# EAGLE board arduino_block-GiantPanel-v10 (EAGLE 6.6.0), part 1 of 16
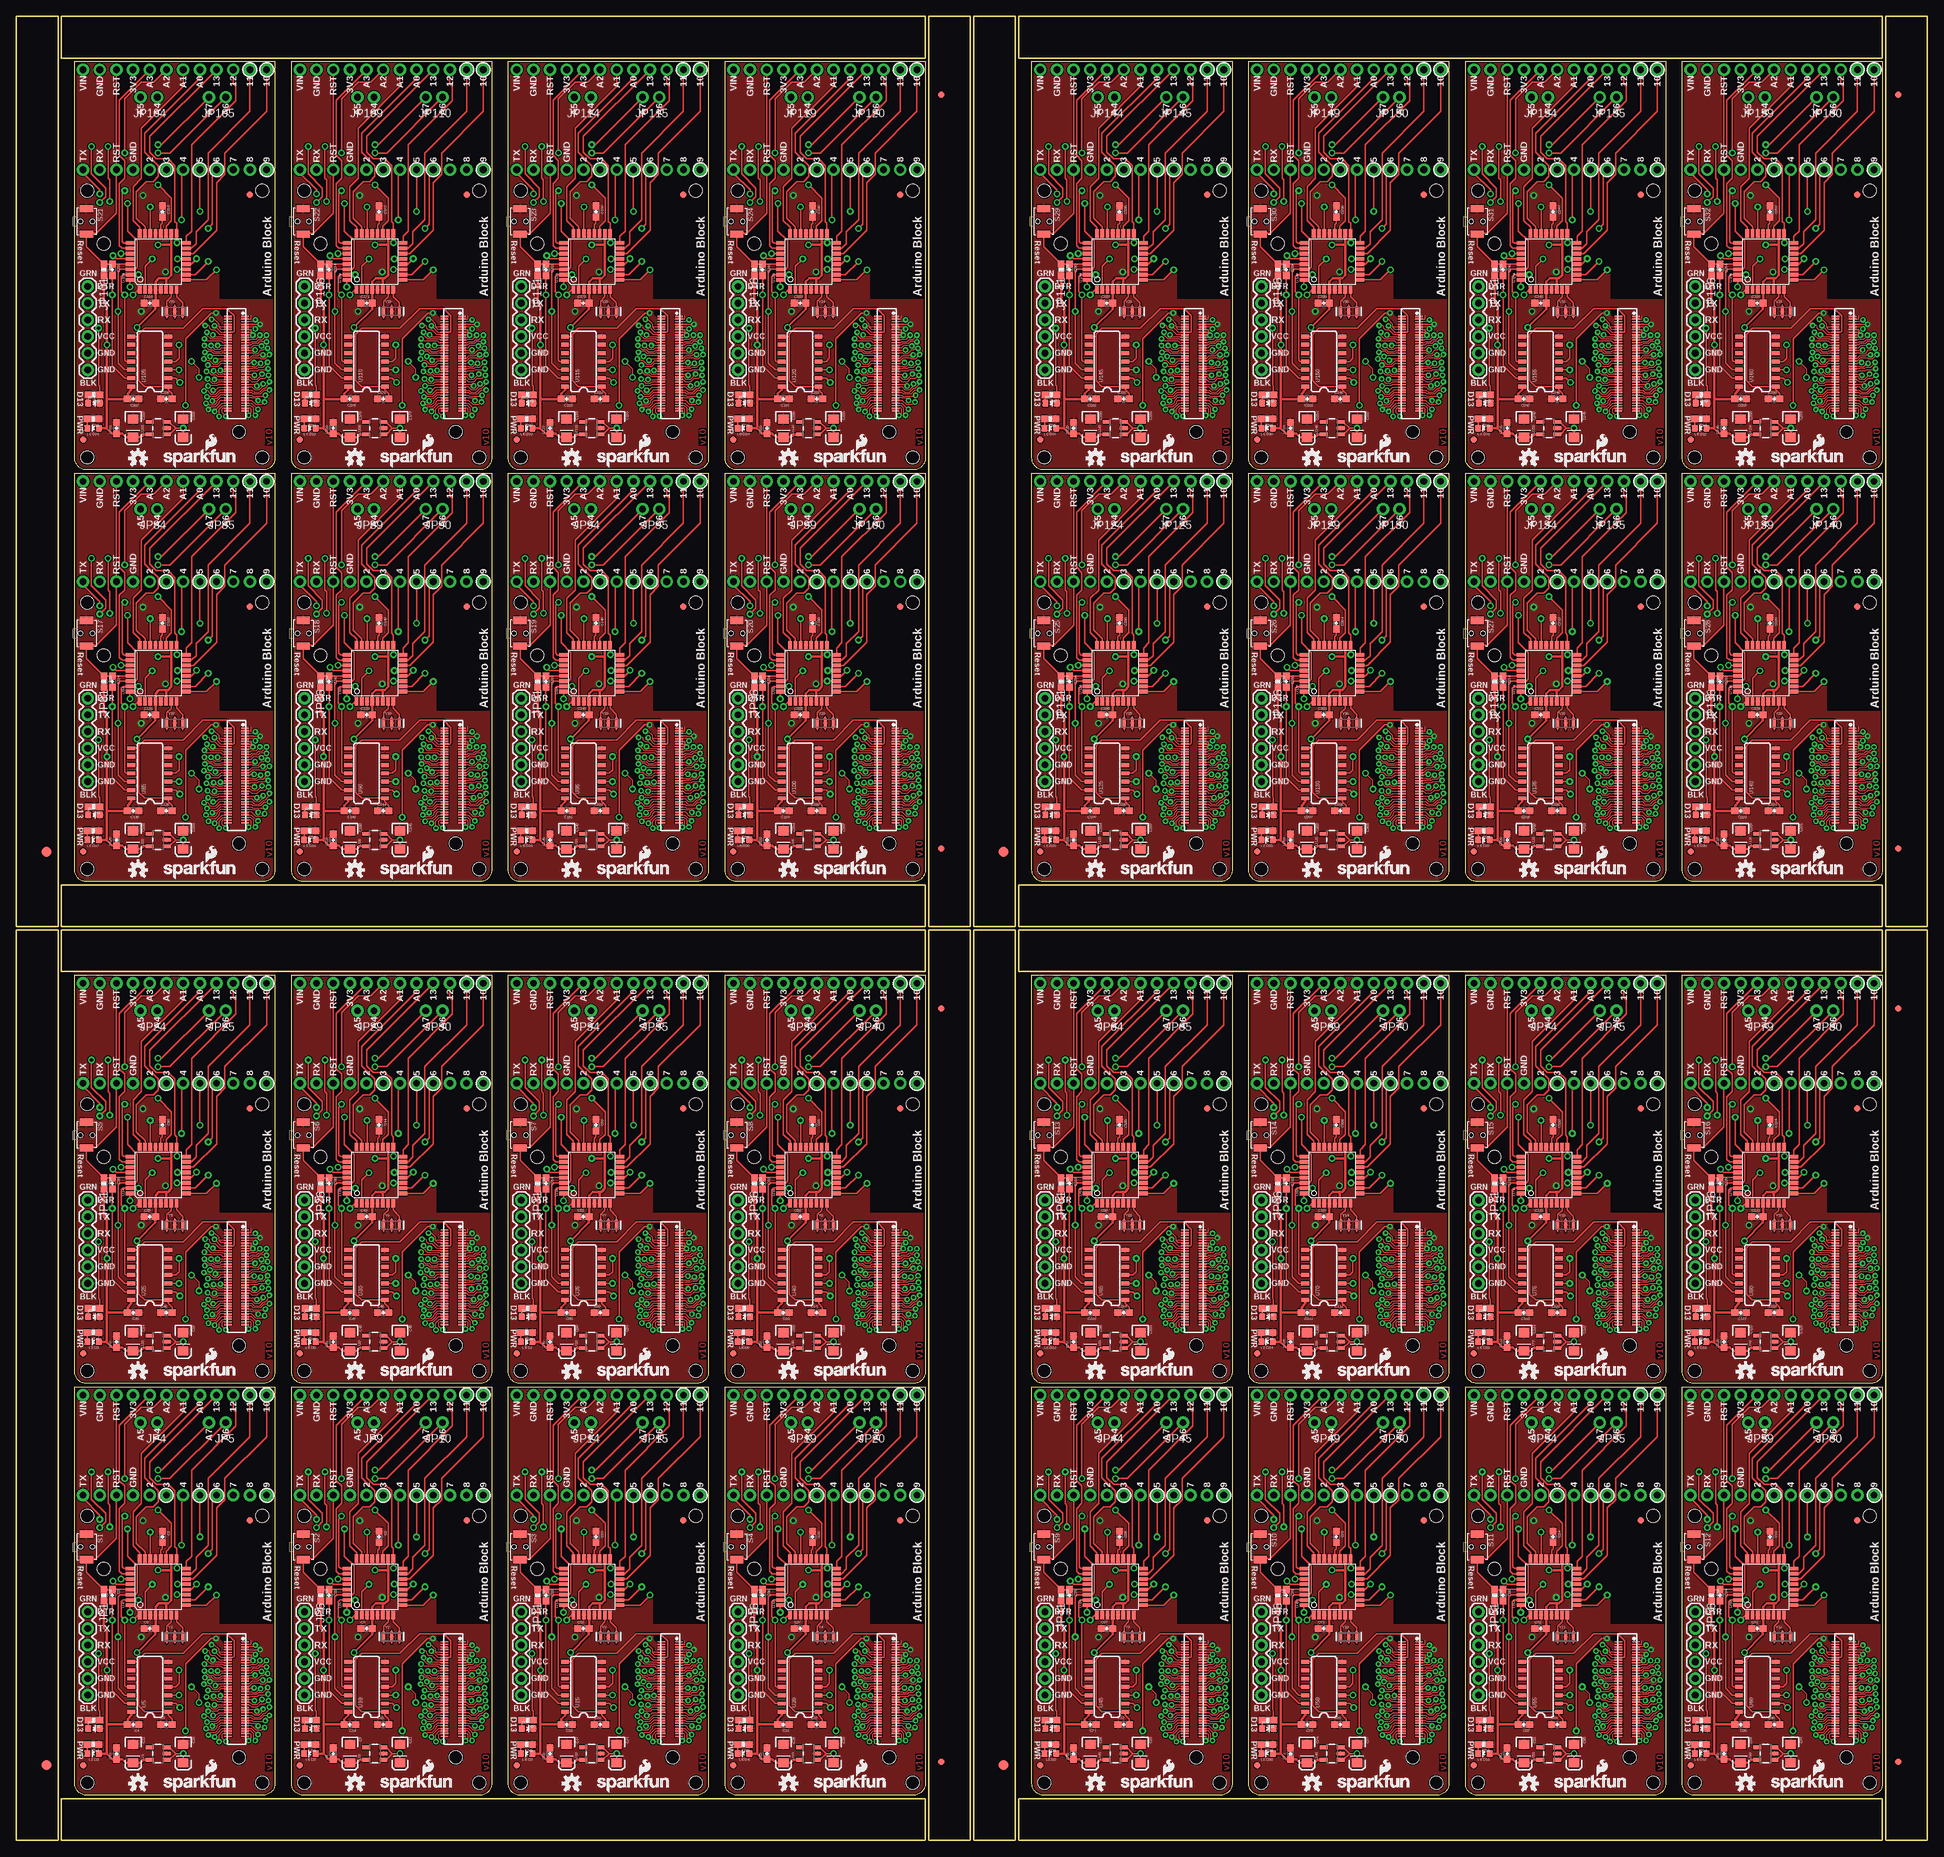
[diagram p0: board, top side]
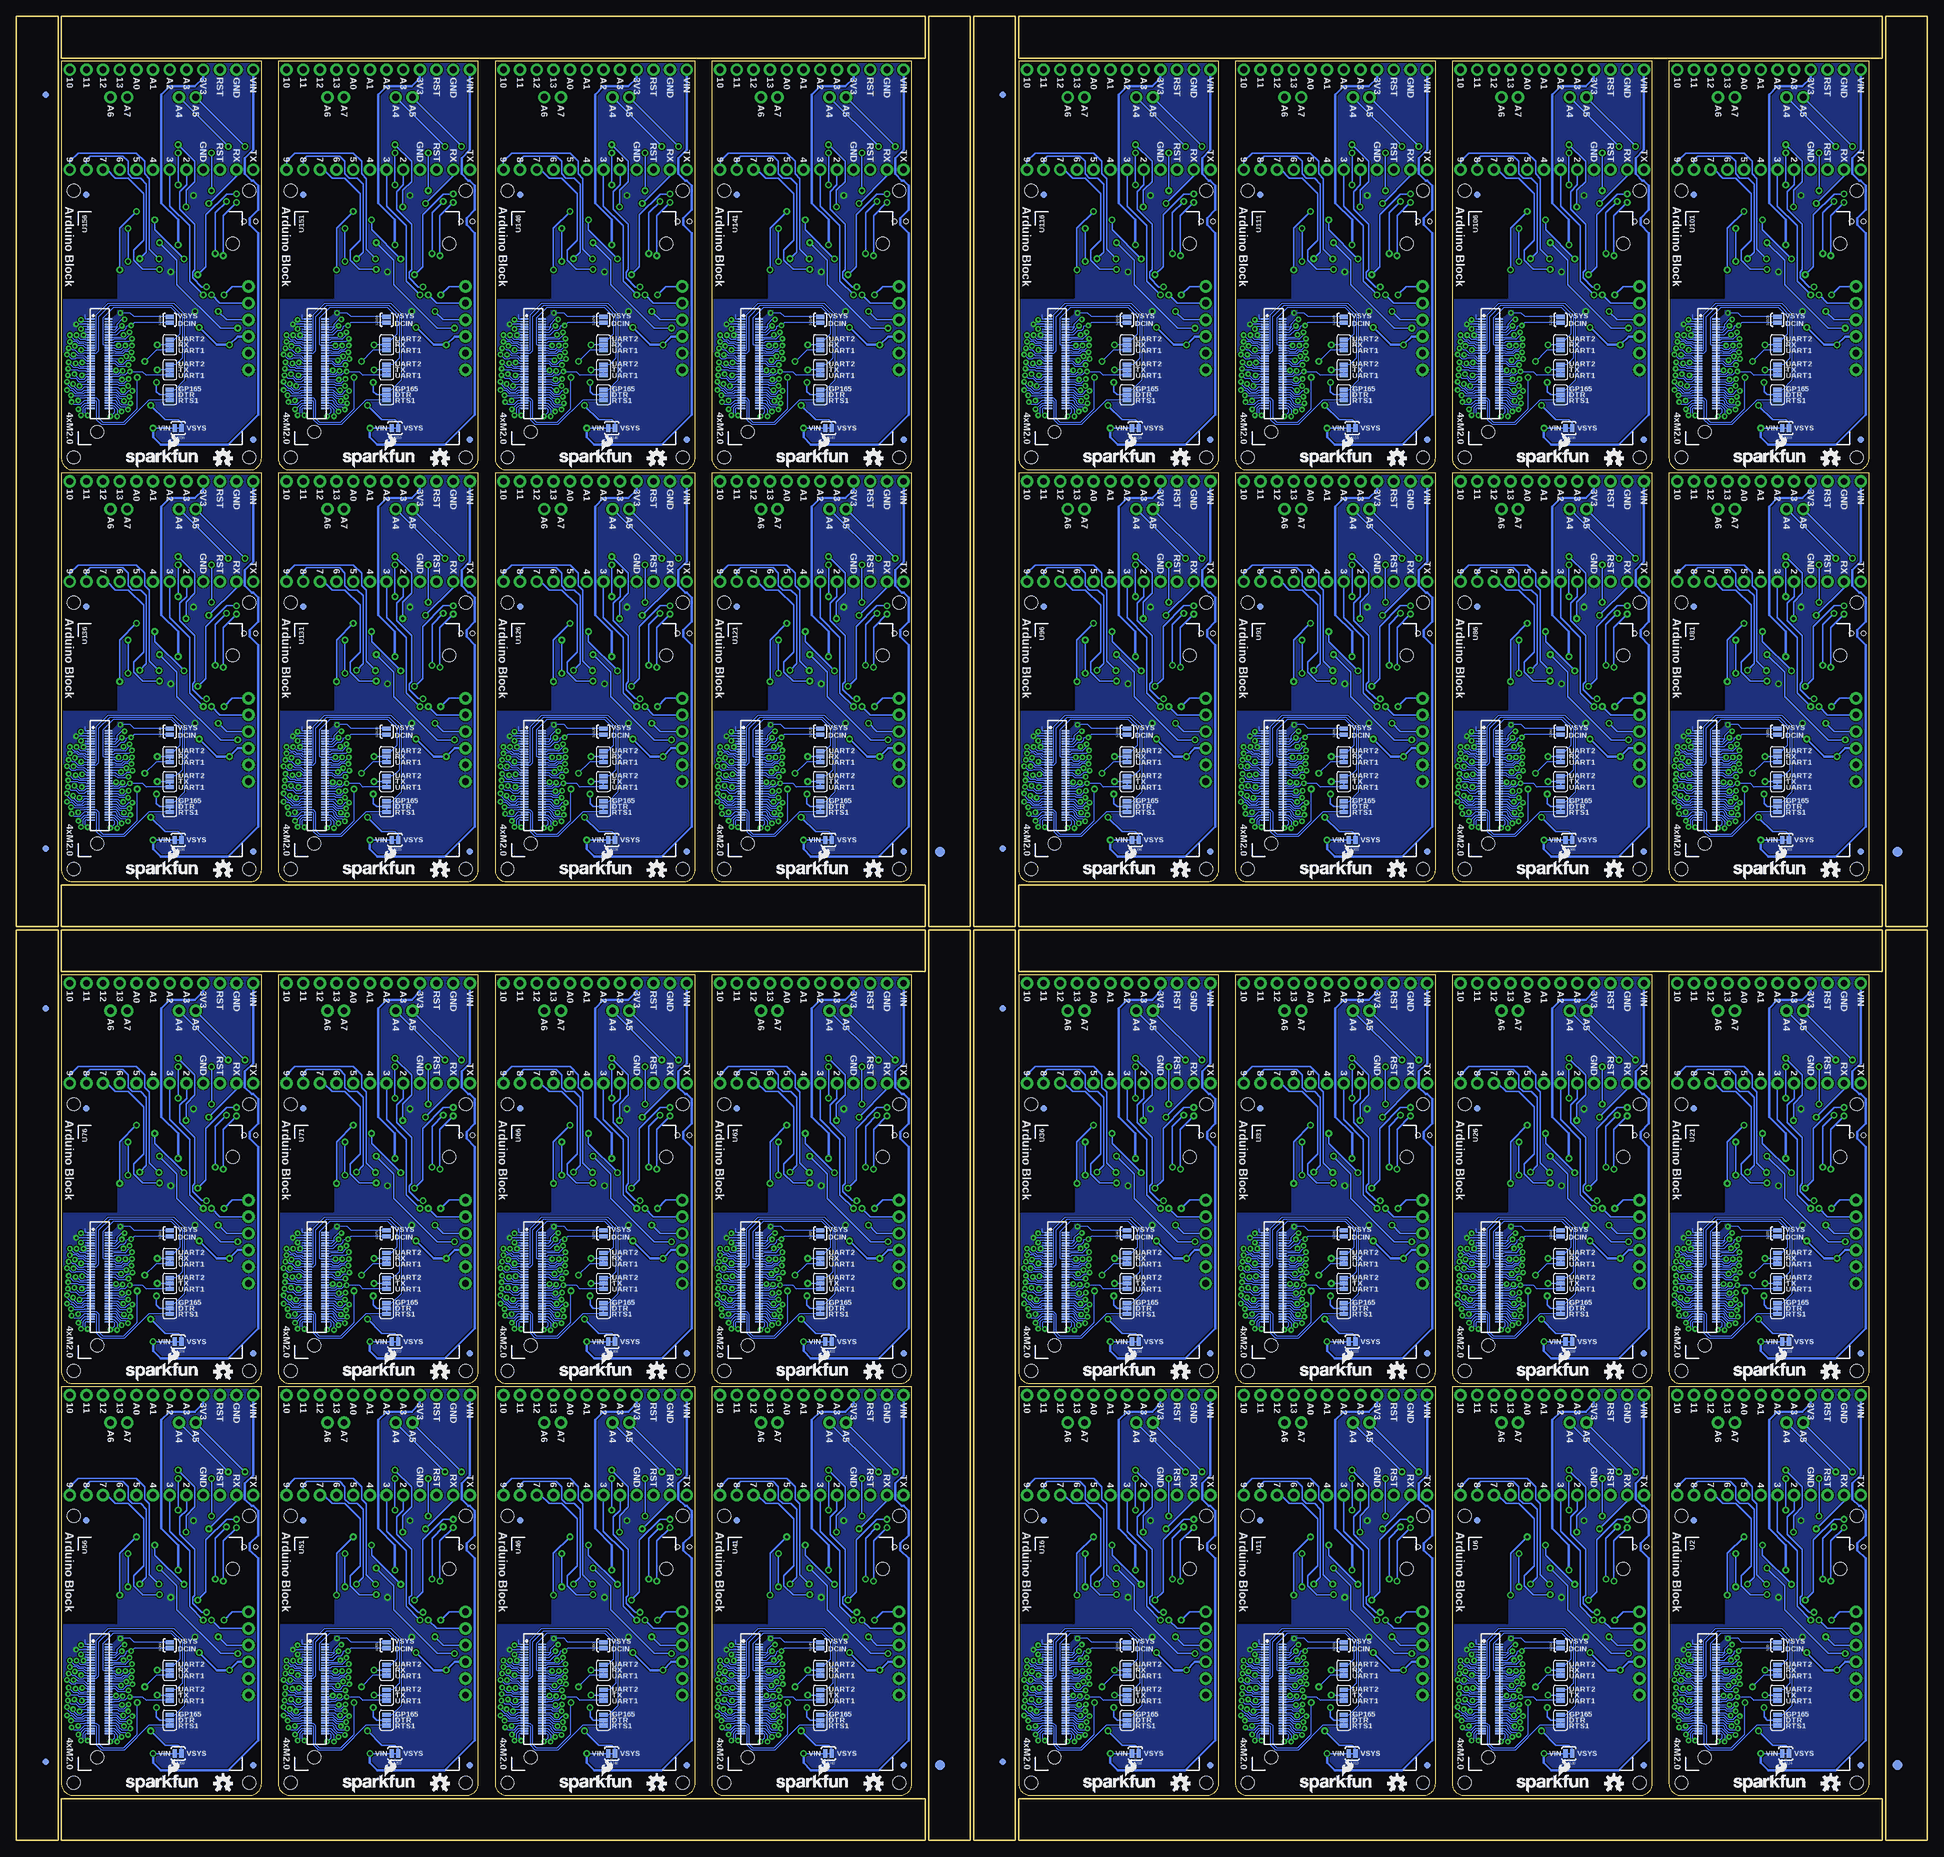
[diagram p1: board, bottom side, seen from below]

Size 291.08 x 277.88 mm. Coordinates in mm from the lower left corner, seen from the top.
Outline: 256 segments
Copper layers (1*16): Top 0.035mm / dielectric 1.5mm / Bottom 0.035mm
Design rules "SparkFun-2-layer *": minimum track width 6mil, minimum drill 13mil, track to track 6mil, track to pad 6mil, pad to pad 6mil, via to via 6mil, smd to smd 6mil, copper to edge 8mil, drill to drill 8mil, minimum pad ring 12mil, minimum via ring 10mil, stop-mask expansion 4mil, vias tented up to drill 20mil, thermal gap 6mil
Net classes: 1 vcc: width 0.254 mm
Holes 2 mm at 37.47,8.76 10.79,8.76 10.79,49.4 37.47,49.4 70.48,8.76 43.81,8.76 43.81,49.4 70.48,49.4 103.5,8.76 76.83,8.76 76.83,49.4 103.5,49.4 136.53,8.76 109.86,8.76 109.86,49.4 136.53,49.4 37.47,71.5 10.79,71.5 10.79,112.14 37.47,112.14 70.48,71.5 43.81,71.5 43.81,112.14 70.48,112.14 103.5,71.5 76.83,71.5 76.83,112.14 103.5,112.14 136.53,71.5 109.86,71.5 109.86,112.14 136.53,112.14 183.26,8.76 156.59,8.76 156.59,49.4 183.26,49.4 216.28,8.76 189.61,8.76 189.61,49.4 216.28,49.4 249.3,8.76 222.63,8.76 222.63,49.4 249.3,49.4 282.32,8.76 255.65,8.76 255.65,49.4 282.32,49.4 183.26,71.5 156.59,71.5 156.59,112.14 183.26,112.14 216.28,71.5 189.61,71.5 189.61,112.14 216.28,112.14 249.3,71.5 222.63,71.5 222.63,112.14 249.3,112.14 282.32,71.5 255.65,71.5 255.65,112.14 282.32,112.14 37.47,147.96 10.79,147.96 10.79,188.59 37.47,188.59 70.48,147.96 43.81,147.96 43.81,188.59 70.48,188.59 103.5,147.96 76.83,147.96 76.83,188.59 103.5,188.59 136.53,147.96 109.86,147.96 109.86,188.59 136.53,188.59 37.47,210.69 10.79,210.69 10.79,251.33 37.47,251.33 70.48,210.69 43.81,210.69 43.81,251.33 70.48,251.33 103.5,210.69 76.83,210.69 76.83,251.33 103.5,251.33 136.53,210.69 109.86,210.69 109.86,251.33 136.53,251.33 183.26,147.96 156.59,147.96 156.59,188.59 183.26,188.59 216.28,147.96 189.61,147.96 189.61,188.59 216.28,188.59 249.3,147.96 222.63,147.96 222.63,188.59 249.3,188.59 282.32,147.96 255.65,147.96 255.65,188.59 282.32,188.59 183.26,210.69 156.59,210.69 156.59,251.33 183.26,251.33 216.28,210.69 189.61,210.69 189.61,251.33 216.28,251.33 249.3,210.69 222.63,210.69 222.63,251.33 249.3,251.33 282.32,210.69 255.65,210.69 255.65,251.33 282.32,251.33
tRestrict: area 31,33 to 39.4,51.3; area 64,33 to 72.4,51.3; area 97,33 to 105.4,51.3; area 130,33 to 138.4,51.3; area 31,95.8 to 39.4,114; area 64,95.8 to 72.4,114; area 97,95.8 to 105.4,114; area 130,95.8 to 138.4,114; area 176.8,33 to 185.2,51.3; area 209.8,33 to 218.2,51.3; area 242.8,33 to 251.2,51.3; area 275.8,33 to 284.2,51.3; 20 more areas
bRestrict: area 31,33 to 39.4,51.3; area 64,33 to 72.4,51.3; area 97,33 to 105.4,51.3; area 130,33 to 138.4,51.3; area 31,95.8 to 39.4,114; area 64,95.8 to 72.4,114; area 97,95.8 to 105.4,114; area 130,95.8 to 138.4,114; area 176.8,33 to 185.2,51.3; area 209.8,33 to 218.2,51.3; area 242.8,33 to 251.2,51.3; area 275.8,33 to 284.2,51.3; 20 more areas

## Footprints (pad centres in the part's own frame; a part is rotated, then mirrored left to right if it is on the bottom)
0603-CAP = smd 1.1 x 1: 1 -0.85,0; 2 0.85,0
EIA3216 = smd 1.4 x 1.6: A 1.4,0; C -1.4,0
0603-LED-ALT1 = smd 1 x 1: A 0,-0.877; C 0,0.877
FIDUCIAL-1.5X3 = smd 1.5 x 1.5: 1 0,0
FIDUCIAL-1X2 = smd 1 x 1: 1 0,0
1X06 = drill 1.016 pad 1.88: 1 0,0; 2 2.54,0; 3 5.08,0; 4 7.62,0; 5 10.16,0; 6 12.7,0
1X12_NO_SILK = drill 1.016 pad 1.88: 1 0,0; 2 2.54,0; 3 5.08,0; 4 7.62,0; 5 10.16,0; 6 12.7,0; 7 15.24,0; 8 17.78,0; 9 20.32,0; 10 22.86,0; 11 25.4,0; 12 27.94,0
1X02_NO_SILK = drill 1.016 pad 1.88: 1 0,0; 2 2.54,0
0603-RES = smd 1.1 x 1: 1 -0.85,0; 2 0.85,0
TACTILE_SWITCH-SMD-RIGHT-ANGLE = smd 1.1 x 2: 1 -1.95,0; 2 1.95,0 | hole 0.7: 0,0.9; 0,-0.9
PAD-JUMPER-3-2OF3_NC_BY_TRACE_YES_SILK_FULL_BOX = smd 0.635 x 1.27: 1 -0.813,0; 2 0,0; 3 0.813,0
PAD-JUMPER-2-NC_BY_TRACE_YES_SILK = smd 0.635 x 1.27: 1 -0.508,0; 2 0.508,0
PAD-JUMPER-2-NO_YES_SILK = smd 0.635 x 1.27: 1 -0.45,0; 2 0.45,0
SOT23-5 = smd 0.55 x 1.2: 1 -0.95,-1.3; 2 0,-1.3; 3 0.95,-1.3; 4 0.95,1.3; 5 -0.95,1.3
EDISON_DAUGHTER = smd 1.14 x 0.2: 1 1.98,19.17; 2 4.62,19.17; 3 1.98,18.77; 4 4.62,18.77; 5 1.98,18.37; 6 4.62,18.37; 7 1.98,17.97; 8 4.62,17.97; 9 1.98,17.57; 10 4.62,17.57; 11 1.98,17.17; 12 4.62,17.17; 13 1.98,16.77; 14 4.62,16.77; 15 1.98,16.37; 16 4.62,16.37; 17 1.98,15.97; 18 4.62,15.97; 19 1.98,15.57; 20 4.62,15.57; 21 1.98,15.17; 22 4.62,15.17; 23 1.98,14.77; 24 4.62,14.77; 25 1.98,14.37; 26 4.62,14.37; 27 1.98,13.97; 28 4.62,13.97; 29 1.98,13.57; 30 4.62,13.57; 31 1.98,13.17; 32 4.62,13.17; 33 1.98,12.77; 34 4.62,12.77; 35 1.98,12.37; 36 4.62,12.37; 37 1.98,11.97; 38 4.62,11.97; 39 1.98,11.57; 40 4.62,11.57; 41 1.98,11.17; 42 4.62,11.17; 43 1.98,10.77; 44 4.62,10.77; 45 1.98,10.37; 46 4.62,10.37; 47 1.98,9.97; 48 4.62,9.97; 49 1.98,9.57; 50 4.62,9.57; 51 1.98,9.17; 52 4.62,9.17; 53 1.98,8.77; 54 4.62,8.77; 55 1.98,8.37; 56 4.62,8.37; 57 1.98,7.97; 58 4.62,7.97; 59 1.98,7.57; 60 4.62,7.57; 61 1.98,7.17; 62 4.62,7.17; 63 1.98,6.77; 64 4.62,6.77; 65 1.98,6.37; 66 4.62,6.37; 67 1.98,5.97; 68 4.62,5.97; 69 1.98,5.57; 70 4.62,5.57 | hole 2: 23.53,30.67; 2.93,1.98
DF40C-70DP-0.4(51) = smd 0.2 x 1.14 bottom: 1 6.8,1.32; 2 6.8,-1.32; 3 6.4,1.32; 4 6.4,-1.32; 5 6,1.32; 6 6,-1.32; 7 5.6,1.32; 8 5.6,-1.32; 9 5.2,1.32; 10 5.2,-1.32; 11 4.8,1.32; 12 4.8,-1.32; 13 4.4,1.32; 14 4.4,-1.32; 15 4,1.32; 16 4,-1.32; 17 3.6,1.32; 18 3.6,-1.32; 19 3.2,1.32; 20 3.2,-1.32; 21 2.8,1.32; 22 2.8,-1.32; 23 2.4,1.32; 24 2.4,-1.32; 25 2,1.32; 26 2,-1.32; 27 1.6,1.32; 28 1.6,-1.32; 29 1.2,1.32; 30 1.2,-1.32; 31 0.8,1.32; 32 0.8,-1.32; 33 0.4,1.32; 34 0.4,-1.32; 35 0,1.32; 36 0,-1.32; 37 -0.4,1.32; 38 -0.4,-1.32; 39 -0.8,1.32; 40 -0.8,-1.32; 41 -1.2,1.32; 42 -1.2,-1.32; 43 -1.6,1.32; 44 -1.6,-1.32; 45 -2,1.32; 46 -2,-1.32; 47 -2.4,1.32; 48 -2.4,-1.32; 49 -2.8,1.32; 50 -2.8,-1.32; 51 -3.2,1.32; 52 -3.2,-1.32; 53 -3.6,1.32; 54 -3.6,-1.32; 55 -4,1.32; 56 -4,-1.32; 57 -4.4,1.32; 58 -4.4,-1.32; 59 -4.8,1.32; 60 -4.8,-1.32; 61 -5.2,1.32; 62 -5.2,-1.32; 63 -5.6,1.32; 64 -5.6,-1.32; 65 -6,1.32; 66 -6,-1.32; 67 -6.4,1.32; 68 -6.4,-1.32; 69 -6.8,1.32; 70 -6.8,-1.32; NC1 7.2,1.32; NC2 7.2,-1.32; NC3 -7.2,-1.32; NC4 -7.2,1.32
TQFP32-08 = smd 1.27 x 0.559: 1 -4.293,2.8; 2 -4.293,2; 3 -4.293,1.2; 4 -4.293,0.4; 5 -4.293,-0.4; 6 -4.293,-1.2; 7 -4.293,-2; 8 -4.293,-2.8; 17 4.293,-2.8; 18 4.293,-2; 19 4.293,-1.2; 20 4.293,-0.4; 21 4.293,0.4; 22 4.293,1.2; 23 4.293,2; 24 4.293,2.8 | smd 0.559 x 1.27: 9 -2.8,-4.293; 10 -2,-4.293; 11 -1.2,-4.293; 12 -0.4,-4.293; 13 0.4,-4.293; 14 1.2,-4.293; 15 2,-4.293; 16 2.8,-4.293; 25 2.8,4.293; 26 2,4.293; 27 1.2,4.293; 28 0.4,4.293; 29 -0.4,4.293; 30 -1.2,4.293; 31 -2,4.293; 32 -2.8,4.293
SO14 = smd 0.6 x 1.2: 1 -3.81,-2.8; 2 -2.54,-2.8; 3 -1.27,-2.8; 4 0,-2.8; 5 1.27,-2.8; 6 2.54,-2.8; 7 3.81,-2.8; 8 3.81,2.8; 9 2.54,2.8; 10 1.27,2.8; 11 0,2.8; 12 -1.27,2.8; 13 -2.54,2.8; 14 -3.81,2.8
RESONATOR-SMD = smd 0.45 x 1.905: 1 -1.2,0; 2 0,0; 3 1.2,0

## Placement (x,y rotation side)
C1  0.1uF  [0603-CAP]  22.23,46.23 270 top
C2  0.1uF  [0603-CAP]  14.61,37.34 270 top
C3  0.1uF  [0603-CAP]  20.32,32.26 0 top
C4  0.1uF  [0603-CAP]  17.78,17.65 180 top
C5  0.1uF  [0603-CAP]  22.86,17.65 0 top
C6  0.1uF  [0603-CAP]  48.26,13.21 90 top
C7  10uF  [EIA3216]  50.8,13.21 270 top
C8  0.1uF  [0603-CAP]  53.34,32.26 0 top
C9  0.1uF  [0603-CAP]  55.24,46.23 270 top
C10  0.1uF  [0603-CAP]  15.24,13.21 90 top
C11  10uF  [EIA3216]  58.42,13.21 270 top
C12  0.1uF  [0603-CAP]  47.62,37.34 270 top
C13  10uF  [EIA3216]  17.78,13.21 270 top
C14  0.1uF  [0603-CAP]  50.8,17.65 180 top
C15  0.1uF  [0603-CAP]  55.88,17.65 0 top
C16  0.1uF  [0603-CAP]  81.28,13.21 90 top
C17  10uF  [EIA3216]  83.82,13.21 270 top
C18  0.1uF  [0603-CAP]  86.36,32.26 0 top
C19  10uF  [EIA3216]  25.4,13.21 270 top
C20  0.1uF  [0603-CAP]  88.27,46.23 270 top
C21  10uF  [EIA3216]  91.44,13.21 270 top
C22  0.1uF  [0603-CAP]  80.64,37.34 270 top
C23  0.1uF  [0603-CAP]  83.82,17.65 180 top
C24  0.1uF  [0603-CAP]  88.9,17.65 0 top
C25  0.1uF  [0603-CAP]  114.3,13.21 90 top
C26  10uF  [EIA3216]  116.84,13.21 270 top
C27  0.1uF  [0603-CAP]  119.38,32.26 0 top
C28  0.1uF  [0603-CAP]  121.28,46.23 270 top
C29  10uF  [EIA3216]  124.46,13.21 270 top
C30  0.1uF  [0603-CAP]  113.67,37.34 270 top
C31  0.1uF  [0603-CAP]  116.84,17.65 180 top
C32  0.1uF  [0603-CAP]  121.92,17.65 0 top
C33  0.1uF  [0603-CAP]  15.24,75.95 90 top
C34  10uF  [EIA3216]  17.78,75.95 270 top
C35  0.1uF  [0603-CAP]  20.32,95 0 top
C36  0.1uF  [0603-CAP]  22.23,108.97 270 top
C37  10uF  [EIA3216]  25.4,75.95 270 top
C38  0.1uF  [0603-CAP]  14.61,100.08 270 top
C39  0.1uF  [0603-CAP]  17.78,80.39 180 top
C40  0.1uF  [0603-CAP]  22.86,80.39 0 top
C41  0.1uF  [0603-CAP]  48.26,75.95 90 top
C42  10uF  [EIA3216]  50.8,75.95 270 top
C43  0.1uF  [0603-CAP]  53.34,95 0 top
C44  0.1uF  [0603-CAP]  55.24,108.97 270 top
C45  10uF  [EIA3216]  58.42,75.95 270 top
C46  0.1uF  [0603-CAP]  47.62,100.08 270 top
C47  0.1uF  [0603-CAP]  50.8,80.39 180 top
C48  0.1uF  [0603-CAP]  55.88,80.39 0 top
C49  0.1uF  [0603-CAP]  81.28,75.95 90 top
C50  10uF  [EIA3216]  83.82,75.95 270 top
C51  0.1uF  [0603-CAP]  86.36,95 0 top
C52  0.1uF  [0603-CAP]  88.27,108.97 270 top
C53  10uF  [EIA3216]  91.44,75.95 270 top
C54  0.1uF  [0603-CAP]  80.64,100.08 270 top
C55  0.1uF  [0603-CAP]  83.82,80.39 180 top
C56  0.1uF  [0603-CAP]  88.9,80.39 0 top
C57  0.1uF  [0603-CAP]  114.3,75.95 90 top
C58  10uF  [EIA3216]  116.84,75.95 270 top
C59  0.1uF  [0603-CAP]  119.38,95 0 top
C60  0.1uF  [0603-CAP]  121.28,108.97 270 top
C61  10uF  [EIA3216]  124.46,75.95 270 top
C62  0.1uF  [0603-CAP]  113.67,100.08 270 top
C63  0.1uF  [0603-CAP]  116.84,80.39 180 top
C64  0.1uF  [0603-CAP]  121.92,80.39 0 top
C65  0.1uF  [0603-CAP]  161.04,13.21 90 top
C66  10uF  [EIA3216]  163.58,13.21 270 top
C67  0.1uF  [0603-CAP]  166.12,32.26 0 top
C68  0.1uF  [0603-CAP]  168.02,46.23 270 top
C69  10uF  [EIA3216]  171.2,13.21 270 top
C70  0.1uF  [0603-CAP]  160.4,37.34 270 top
C71  0.1uF  [0603-CAP]  163.58,17.65 180 top
C72  0.1uF  [0603-CAP]  168.66,17.65 0 top
C73  0.1uF  [0603-CAP]  194.06,13.21 90 top
C74  10uF  [EIA3216]  196.6,13.21 270 top
C75  0.1uF  [0603-CAP]  199.14,32.26 0 top
C76  0.1uF  [0603-CAP]  201.04,46.23 270 top
C77  10uF  [EIA3216]  204.22,13.21 270 top
C78  0.1uF  [0603-CAP]  193.42,37.34 270 top
C79  0.1uF  [0603-CAP]  196.6,17.65 180 top
C80  0.1uF  [0603-CAP]  201.68,17.65 0 top
C81  0.1uF  [0603-CAP]  227.08,13.21 90 top
C82  10uF  [EIA3216]  229.62,13.21 270 top
C83  0.1uF  [0603-CAP]  232.16,32.26 0 top
C84  0.1uF  [0603-CAP]  234.06,46.23 270 top
C85  10uF  [EIA3216]  237.24,13.21 270 top
C86  0.1uF  [0603-CAP]  226.44,37.34 270 top
C87  0.1uF  [0603-CAP]  229.62,17.65 180 top
C88  0.1uF  [0603-CAP]  234.7,17.65 0 top
C89  0.1uF  [0603-CAP]  260.1,13.21 90 top
C90  10uF  [EIA3216]  262.64,13.21 270 top
C91  0.1uF  [0603-CAP]  265.18,32.26 0 top
C92  0.1uF  [0603-CAP]  267.08,46.23 270 top
C93  10uF  [EIA3216]  270.26,13.21 270 top
C94  0.1uF  [0603-CAP]  259.46,37.34 270 top
C95  0.1uF  [0603-CAP]  262.64,17.65 180 top
C96  0.1uF  [0603-CAP]  267.72,17.65 0 top
C97  0.1uF  [0603-CAP]  161.04,75.95 90 top
C98  10uF  [EIA3216]  163.58,75.95 270 top
C99  0.1uF  [0603-CAP]  166.12,95 0 top
C100  0.1uF  [0603-CAP]  168.02,108.97 270 top
C101  10uF  [EIA3216]  171.2,75.95 270 top
C102  0.1uF  [0603-CAP]  160.4,100.08 270 top
C103  0.1uF  [0603-CAP]  163.58,80.39 180 top
C104  0.1uF  [0603-CAP]  168.66,80.39 0 top
C105  0.1uF  [0603-CAP]  194.06,75.95 90 top
C106  10uF  [EIA3216]  196.6,75.95 270 top
C107  0.1uF  [0603-CAP]  199.14,95 0 top
C108  0.1uF  [0603-CAP]  201.04,108.97 270 top
C109  10uF  [EIA3216]  204.22,75.95 270 top
C110  0.1uF  [0603-CAP]  193.42,100.08 270 top
C111  0.1uF  [0603-CAP]  196.6,80.39 180 top
C112  0.1uF  [0603-CAP]  201.68,80.39 0 top
C113  0.1uF  [0603-CAP]  227.08,75.95 90 top
C114  10uF  [EIA3216]  229.62,75.95 270 top
C115  0.1uF  [0603-CAP]  232.16,95 0 top
C116  0.1uF  [0603-CAP]  234.06,108.97 270 top
C117  10uF  [EIA3216]  237.24,75.95 270 top
C118  0.1uF  [0603-CAP]  226.44,100.08 270 top
C119  0.1uF  [0603-CAP]  229.62,80.39 180 top
C120  0.1uF  [0603-CAP]  234.7,80.39 0 top
C121  0.1uF  [0603-CAP]  260.1,75.95 90 top
C122  10uF  [EIA3216]  262.64,75.95 270 top
C123  0.1uF  [0603-CAP]  265.18,95 0 top
C124  0.1uF  [0603-CAP]  267.08,108.97 270 top
C125  10uF  [EIA3216]  270.26,75.95 270 top
C126  0.1uF  [0603-CAP]  259.46,100.08 270 top
C127  0.1uF  [0603-CAP]  262.64,80.39 180 top
C128  0.1uF  [0603-CAP]  267.72,80.39 0 top
C129  0.1uF  [0603-CAP]  15.24,152.4 90 top
C130  10uF  [EIA3216]  17.78,152.4 270 top
C131  0.1uF  [0603-CAP]  20.32,171.45 0 top
C132  0.1uF  [0603-CAP]  22.23,185.42 270 top
C133  10uF  [EIA3216]  25.4,152.4 270 top
C134  0.1uF  [0603-CAP]  14.61,176.53 270 top
C135  0.1uF  [0603-CAP]  17.78,156.84 180 top
C136  0.1uF  [0603-CAP]  22.86,156.84 0 top
C137  0.1uF  [0603-CAP]  48.26,152.4 90 top
C138  10uF  [EIA3216]  50.8,152.4 270 top
C139  0.1uF  [0603-CAP]  53.34,171.45 0 top
C140  0.1uF  [0603-CAP]  55.24,185.42 270 top
C141  10uF  [EIA3216]  58.42,152.4 270 top
C142  0.1uF  [0603-CAP]  47.62,176.53 270 top
C143  0.1uF  [0603-CAP]  50.8,156.84 180 top
C144  0.1uF  [0603-CAP]  55.88,156.84 0 top
C145  0.1uF  [0603-CAP]  81.28,152.4 90 top
C146  10uF  [EIA3216]  83.82,152.4 270 top
C147  0.1uF  [0603-CAP]  86.36,171.45 0 top
C148  0.1uF  [0603-CAP]  88.27,185.42 270 top
C149  10uF  [EIA3216]  91.44,152.4 270 top
C150  0.1uF  [0603-CAP]  80.64,176.53 270 top
C151  0.1uF  [0603-CAP]  83.82,156.84 180 top
C152  0.1uF  [0603-CAP]  88.9,156.84 0 top
C153  0.1uF  [0603-CAP]  114.3,152.4 90 top
C154  10uF  [EIA3216]  116.84,152.4 270 top
C155  0.1uF  [0603-CAP]  119.38,171.45 0 top
C156  0.1uF  [0603-CAP]  121.28,185.42 270 top
C157  10uF  [EIA3216]  124.46,152.4 270 top
C158  0.1uF  [0603-CAP]  113.67,176.53 270 top
C159  0.1uF  [0603-CAP]  116.84,156.84 180 top
C160  0.1uF  [0603-CAP]  121.92,156.84 0 top
C161  0.1uF  [0603-CAP]  15.24,215.14 90 top
C162  10uF  [EIA3216]  17.78,215.14 270 top
C163  0.1uF  [0603-CAP]  20.32,234.19 0 top
C164  0.1uF  [0603-CAP]  22.23,248.16 270 top
C165  10uF  [EIA3216]  25.4,215.14 270 top
C166  0.1uF  [0603-CAP]  14.61,239.27 270 top
C167  0.1uF  [0603-CAP]  17.78,219.58 180 top
C168  0.1uF  [0603-CAP]  22.86,219.58 0 top
C169  0.1uF  [0603-CAP]  48.26,215.14 90 top
C170  10uF  [EIA3216]  50.8,215.14 270 top
C171  0.1uF  [0603-CAP]  53.34,234.19 0 top
C172  0.1uF  [0603-CAP]  55.24,248.16 270 top
C173  10uF  [EIA3216]  58.42,215.14 270 top
C174  0.1uF  [0603-CAP]  47.62,239.27 270 top
C175  0.1uF  [0603-CAP]  50.8,219.58 180 top
C176  0.1uF  [0603-CAP]  55.88,219.58 0 top
C177  0.1uF  [0603-CAP]  81.28,215.14 90 top
C178  10uF  [EIA3216]  83.82,215.14 270 top
C179  0.1uF  [0603-CAP]  86.36,234.19 0 top
C180  0.1uF  [0603-CAP]  88.27,248.16 270 top
C181  10uF  [EIA3216]  91.44,215.14 270 top
C182  0.1uF  [0603-CAP]  80.64,239.27 270 top
C183  0.1uF  [0603-CAP]  83.82,219.58 180 top
C184  0.1uF  [0603-CAP]  88.9,219.58 0 top
C185  0.1uF  [0603-CAP]  114.3,215.14 90 top
C186  10uF  [EIA3216]  116.84,215.14 270 top
C187  0.1uF  [0603-CAP]  119.38,234.19 0 top
C188  0.1uF  [0603-CAP]  121.28,248.16 270 top
C189  10uF  [EIA3216]  124.46,215.14 270 top
C190  0.1uF  [0603-CAP]  113.67,239.27 270 top
C191  0.1uF  [0603-CAP]  116.84,219.58 180 top
C192  0.1uF  [0603-CAP]  121.92,219.58 0 top
C193  0.1uF  [0603-CAP]  161.04,152.4 90 top
C194  10uF  [EIA3216]  163.58,152.4 270 top
C195  0.1uF  [0603-CAP]  166.12,171.45 0 top
C196  0.1uF  [0603-CAP]  168.02,185.42 270 top
C197  10uF  [EIA3216]  171.2,152.4 270 top
C198  0.1uF  [0603-CAP]  160.4,176.53 270 top
C199  0.1uF  [0603-CAP]  163.58,156.84 180 top
C200  0.1uF  [0603-CAP]  168.66,156.84 0 top
C201  0.1uF  [0603-CAP]  194.06,152.4 90 top
C202  10uF  [EIA3216]  196.6,152.4 270 top
C203  0.1uF  [0603-CAP]  199.14,171.45 0 top
C204  0.1uF  [0603-CAP]  201.04,185.42 270 top
C205  10uF  [EIA3216]  204.22,152.4 270 top
C206  0.1uF  [0603-CAP]  193.42,176.53 270 top
C207  0.1uF  [0603-CAP]  196.6,156.84 180 top
C208  0.1uF  [0603-CAP]  201.68,156.84 0 top
C209  0.1uF  [0603-CAP]  227.08,152.4 90 top
C210  10uF  [EIA3216]  229.62,152.4 270 top
C211  0.1uF  [0603-CAP]  232.16,171.45 0 top
C212  0.1uF  [0603-CAP]  234.06,185.42 270 top
C213  10uF  [EIA3216]  237.24,152.4 270 top
C214  0.1uF  [0603-CAP]  226.44,176.53 270 top
C215  0.1uF  [0603-CAP]  229.62,156.84 180 top
C216  0.1uF  [0603-CAP]  234.7,156.84 0 top
C217  0.1uF  [0603-CAP]  260.1,152.4 90 top
C218  10uF  [EIA3216]  262.64,152.4 270 top
C219  0.1uF  [0603-CAP]  265.18,171.45 0 top
C220  0.1uF  [0603-CAP]  267.08,185.42 270 top
C221  10uF  [EIA3216]  270.26,152.4 270 top
C222  0.1uF  [0603-CAP]  259.46,176.53 270 top
C223  0.1uF  [0603-CAP]  262.64,156.84 180 top
C224  0.1uF  [0603-CAP]  267.72,156.84 0 top
C225  0.1uF  [0603-CAP]  161.04,215.14 90 top
C226  10uF  [EIA3216]  163.58,215.14 270 top
C227  0.1uF  [0603-CAP]  166.12,234.19 0 top
C228  0.1uF  [0603-CAP]  168.02,248.16 270 top
C229  10uF  [EIA3216]  171.2,215.14 270 top
C230  0.1uF  [0603-CAP]  160.4,239.27 270 top
C231  0.1uF  [0603-CAP]  163.58,219.58 180 top
C232  0.1uF  [0603-CAP]  168.66,219.58 0 top
C233  0.1uF  [0603-CAP]  194.06,215.14 90 top
C234  10uF  [EIA3216]  196.6,215.14 270 top
C235  0.1uF  [0603-CAP]  199.14,234.19 0 top
C236  0.1uF  [0603-CAP]  201.04,248.16 270 top
C237  10uF  [EIA3216]  204.22,215.14 270 top
C238  0.1uF  [0603-CAP]  193.42,239.27 270 top
C239  0.1uF  [0603-CAP]  196.6,219.58 180 top
C240  0.1uF  [0603-CAP]  201.68,219.58 0 top
C241  0.1uF  [0603-CAP]  227.08,215.14 90 top
C242  10uF  [EIA3216]  229.62,215.14 270 top
C243  0.1uF  [0603-CAP]  232.16,234.19 0 top
C244  0.1uF  [0603-CAP]  234.06,248.16 270 top
C245  10uF  [EIA3216]  237.24,215.14 270 top
C246  0.1uF  [0603-CAP]  226.44,239.27 270 top
C247  0.1uF  [0603-CAP]  229.62,219.58 180 top
C248  0.1uF  [0603-CAP]  234.7,219.58 0 top
C249  0.1uF  [0603-CAP]  260.1,215.14 90 top
C250  10uF  [EIA3216]  262.64,215.14 270 top
C251  0.1uF  [0603-CAP]  265.18,234.19 0 top
C252  0.1uF  [0603-CAP]  267.08,248.16 270 top
C253  10uF  [EIA3216]  270.26,215.14 270 top
C254  0.1uF  [0603-CAP]  259.46,239.27 270 top
C255  0.1uF  [0603-CAP]  262.64,219.58 180 top
C256  0.1uF  [0603-CAP]  267.72,219.58 0 top
D1  Green  [0603-LED-ALT1]  44.83,17.02 270 top
D2  Green  [0603-LED-ALT1]  77.85,17.02 270 top
D3  Green  [0603-LED-ALT1]  11.81,17.02 270 top
D4  Green  [0603-LED-ALT1]  110.87,17.02 270 top
D5  Green  [0603-LED-ALT1]  11.81,79.76 270 top
D6  Green  [0603-LED-ALT1]  44.83,79.76 270 top
D7  Green  [0603-LED-ALT1]  77.85,79.76 270 top
D8  Green  [0603-LED-ALT1]  110.87,79.76 270 top
D9  Green  [0603-LED-ALT1]  157.61,17.02 270 top
D10  Green  [0603-LED-ALT1]  190.63,17.02 270 top
D11  Green  [0603-LED-ALT1]  223.65,17.02 270 top
D12  Green  [0603-LED-ALT1]  256.67,17.02 270 top
D13  Green  [0603-LED-ALT1]  157.61,79.76 270 top
D14  Green  [0603-LED-ALT1]  190.63,79.76 270 top
D15  Green  [0603-LED-ALT1]  223.65,79.76 270 top
D16  Green  [0603-LED-ALT1]  256.67,79.76 270 top
D17  Green  [0603-LED-ALT1]  11.81,156.21 270 top
D18  Green  [0603-LED-ALT1]  44.83,156.21 270 top
D19  Green  [0603-LED-ALT1]  77.85,156.21 270 top
D20  Green  [0603-LED-ALT1]  110.87,156.21 270 top
D21  Green  [0603-LED-ALT1]  11.81,218.95 270 top
D22  Green  [0603-LED-ALT1]  44.83,218.95 270 top
D23  Green  [0603-LED-ALT1]  77.85,218.95 270 top
D24  Green  [0603-LED-ALT1]  110.87,218.95 270 top
D25  Green  [0603-LED-ALT1]  157.61,156.21 270 top
D26  Green  [0603-LED-ALT1]  190.63,156.21 270 top
D27  Green  [0603-LED-ALT1]  223.65,156.21 270 top
D28  Green  [0603-LED-ALT1]  256.67,156.21 270 top
D29  Green  [0603-LED-ALT1]  157.61,218.95 270 top
D30  Green  [0603-LED-ALT1]  190.63,218.95 270 top
D31  Green  [0603-LED-ALT1]  223.65,218.95 270 top
D32  Green  [0603-LED-ALT1]  256.67,218.95 270 top
E$1  [FIDUCIAL-1.5X3]  4.57,11.43 0 top
E$2  [FIDUCIAL-1.5X3]  4.57,11.43 0 bottom
E$3  [FIDUCIAL-1X2]  140.84,126.75 180 bottom
E$4  [FIDUCIAL-1X2]  140.84,11.94 0 top
E$5  [FIDUCIAL-1X2]  140.84,126.75 180 top
E$6  [FIDUCIAL-1X2]  140.84,11.94 0 bottom
E$7  [FIDUCIAL-1X2]  286.64,11.94 0 top
E$8  [FIDUCIAL-1X2]  286.64,126.75 180 top
E$9  [FIDUCIAL-1.5X3]  150.37,11.43 0 top
E$10  [FIDUCIAL-1.5X3]  150.37,11.43 0 bottom
E$11  [FIDUCIAL-1X2]  286.64,126.75 180 bottom
E$12  [FIDUCIAL-1X2]  286.64,11.94 0 bottom
E$13  [FIDUCIAL-1X2]  140.84,151.13 0 top
E$14  [FIDUCIAL-1X2]  140.84,265.94 180 top
E$15  [FIDUCIAL-1.5X3]  4.57,150.62 0 top
E$16  [FIDUCIAL-1.5X3]  4.57,150.62 0 bottom
E$17  [FIDUCIAL-1X2]  140.84,265.94 180 bottom
E$18  [FIDUCIAL-1X2]  140.84,151.13 0 bottom
E$19  [FIDUCIAL-1X2]  286.64,151.13 0 top
E$20  [FIDUCIAL-1X2]  286.64,265.94 180 top
E$21  [FIDUCIAL-1.5X3]  150.37,150.62 0 top
E$22  [FIDUCIAL-1.5X3]  150.37,150.62 0 bottom
E$23  [FIDUCIAL-1X2]  286.64,265.94 180 bottom
E$24  [FIDUCIAL-1X2]  286.64,151.13 0 bottom
FID1  FIDUCIAL1X2  [FIDUCIAL-1X2]  10.16,11.43 0 top
FID2  FIDUCIAL1X2  [FIDUCIAL-1X2]  35.56,48.77 0 top
FID3  FIDUCIAL1X2  [FIDUCIAL-1X2]  10.16,11.43 0 bottom
FID4  FIDUCIAL1X2  [FIDUCIAL-1X2]  35.56,48.77 0 bottom
FID5  FIDUCIAL1X2  [FIDUCIAL-1X2]  43.18,11.43 0 top
FID6  FIDUCIAL1X2  [FIDUCIAL-1X2]  68.58,48.77 0 top
FID7  FIDUCIAL1X2  [FIDUCIAL-1X2]  43.18,11.43 0 bottom
FID8  FIDUCIAL1X2  [FIDUCIAL-1X2]  68.58,48.77 0 bottom
FID9  FIDUCIAL1X2  [FIDUCIAL-1X2]  76.2,11.43 0 top
FID10  FIDUCIAL1X2  [FIDUCIAL-1X2]  101.6,48.77 0 top
FID11  FIDUCIAL1X2  [FIDUCIAL-1X2]  76.2,11.43 0 bottom
FID12  FIDUCIAL1X2  [FIDUCIAL-1X2]  101.6,48.77 0 bottom
FID13  FIDUCIAL1X2  [FIDUCIAL-1X2]  109.22,11.43 0 top
FID14  FIDUCIAL1X2  [FIDUCIAL-1X2]  134.62,48.77 0 top
FID15  FIDUCIAL1X2  [FIDUCIAL-1X2]  109.22,11.43 0 bottom
FID16  FIDUCIAL1X2  [FIDUCIAL-1X2]  134.62,48.77 0 bottom
FID17  FIDUCIAL1X2  [FIDUCIAL-1X2]  10.16,74.17 0 top
FID18  FIDUCIAL1X2  [FIDUCIAL-1X2]  35.56,111.51 0 top
FID19  FIDUCIAL1X2  [FIDUCIAL-1X2]  10.16,74.17 0 bottom
FID20  FIDUCIAL1X2  [FIDUCIAL-1X2]  35.56,111.51 0 bottom
FID21  FIDUCIAL1X2  [FIDUCIAL-1X2]  43.18,74.17 0 top
FID22  FIDUCIAL1X2  [FIDUCIAL-1X2]  68.58,111.51 0 top
FID23  FIDUCIAL1X2  [FIDUCIAL-1X2]  43.18,74.17 0 bottom
FID24  FIDUCIAL1X2  [FIDUCIAL-1X2]  68.58,111.51 0 bottom
FID25  FIDUCIAL1X2  [FIDUCIAL-1X2]  76.2,74.17 0 top
FID26  FIDUCIAL1X2  [FIDUCIAL-1X2]  101.6,111.51 0 top
FID27  FIDUCIAL1X2  [FIDUCIAL-1X2]  76.2,74.17 0 bottom
FID28  FIDUCIAL1X2  [FIDUCIAL-1X2]  101.6,111.51 0 bottom
FID29  FIDUCIAL1X2  [FIDUCIAL-1X2]  109.22,74.17 0 top
FID30  FIDUCIAL1X2  [FIDUCIAL-1X2]  134.62,111.51 0 top
FID31  FIDUCIAL1X2  [FIDUCIAL-1X2]  109.22,74.17 0 bottom
FID32  FIDUCIAL1X2  [FIDUCIAL-1X2]  134.62,111.51 0 bottom
FID33  FIDUCIAL1X2  [FIDUCIAL-1X2]  155.96,11.43 0 top
FID34  FIDUCIAL1X2  [FIDUCIAL-1X2]  181.36,48.77 0 top
FID35  FIDUCIAL1X2  [FIDUCIAL-1X2]  155.96,11.43 0 bottom
FID36  FIDUCIAL1X2  [FIDUCIAL-1X2]  181.36,48.77 0 bottom
FID37  FIDUCIAL1X2  [FIDUCIAL-1X2]  188.98,11.43 0 top
FID38  FIDUCIAL1X2  [FIDUCIAL-1X2]  214.38,48.77 0 top
FID39  FIDUCIAL1X2  [FIDUCIAL-1X2]  188.98,11.43 0 bottom
FID40  FIDUCIAL1X2  [FIDUCIAL-1X2]  214.38,48.77 0 bottom
FID41  FIDUCIAL1X2  [FIDUCIAL-1X2]  222,11.43 0 top
FID42  FIDUCIAL1X2  [FIDUCIAL-1X2]  247.4,48.77 0 top
FID43  FIDUCIAL1X2  [FIDUCIAL-1X2]  222,11.43 0 bottom
FID44  FIDUCIAL1X2  [FIDUCIAL-1X2]  247.4,48.77 0 bottom
FID45  FIDUCIAL1X2  [FIDUCIAL-1X2]  255.02,11.43 0 top
FID46  FIDUCIAL1X2  [FIDUCIAL-1X2]  280.42,48.77 0 top
FID47  FIDUCIAL1X2  [FIDUCIAL-1X2]  255.02,11.43 0 bottom
FID48  FIDUCIAL1X2  [FIDUCIAL-1X2]  280.42,48.77 0 bottom
FID49  FIDUCIAL1X2  [FIDUCIAL-1X2]  155.96,74.17 0 top
FID50  FIDUCIAL1X2  [FIDUCIAL-1X2]  181.36,111.51 0 top
FID51  FIDUCIAL1X2  [FIDUCIAL-1X2]  155.96,74.17 0 bottom
FID52  FIDUCIAL1X2  [FIDUCIAL-1X2]  181.36,111.51 0 bottom
FID53  FIDUCIAL1X2  [FIDUCIAL-1X2]  188.98,74.17 0 top
FID54  FIDUCIAL1X2  [FIDUCIAL-1X2]  214.38,111.51 0 top
FID55  FIDUCIAL1X2  [FIDUCIAL-1X2]  188.98,74.17 0 bottom
FID56  FIDUCIAL1X2  [FIDUCIAL-1X2]  214.38,111.51 0 bottom
FID57  FIDUCIAL1X2  [FIDUCIAL-1X2]  222,74.17 0 top
FID58  FIDUCIAL1X2  [FIDUCIAL-1X2]  247.4,111.51 0 top
FID59  FIDUCIAL1X2  [FIDUCIAL-1X2]  222,74.17 0 bottom
FID60  FIDUCIAL1X2  [FIDUCIAL-1X2]  247.4,111.51 0 bottom
FID61  FIDUCIAL1X2  [FIDUCIAL-1X2]  255.02,74.17 0 top
FID62  FIDUCIAL1X2  [FIDUCIAL-1X2]  280.42,111.51 0 top
FID63  FIDUCIAL1X2  [FIDUCIAL-1X2]  255.02,74.17 0 bottom
FID64  FIDUCIAL1X2  [FIDUCIAL-1X2]  280.42,111.51 0 bottom
FID65  FIDUCIAL1X2  [FIDUCIAL-1X2]  10.16,150.62 0 top
FID66  FIDUCIAL1X2  [FIDUCIAL-1X2]  35.56,187.96 0 top
FID67  FIDUCIAL1X2  [FIDUCIAL-1X2]  10.16,150.62 0 bottom
FID68  FIDUCIAL1X2  [FIDUCIAL-1X2]  35.56,187.96 0 bottom
FID69  FIDUCIAL1X2  [FIDUCIAL-1X2]  43.18,150.62 0 top
FID70  FIDUCIAL1X2  [FIDUCIAL-1X2]  68.58,187.96 0 top
FID71  FIDUCIAL1X2  [FIDUCIAL-1X2]  43.18,150.62 0 bottom
FID72  FIDUCIAL1X2  [FIDUCIAL-1X2]  68.58,187.96 0 bottom
FID73  FIDUCIAL1X2  [FIDUCIAL-1X2]  76.2,150.62 0 top
FID74  FIDUCIAL1X2  [FIDUCIAL-1X2]  101.6,187.96 0 top
FID75  FIDUCIAL1X2  [FIDUCIAL-1X2]  76.2,150.62 0 bottom
FID76  FIDUCIAL1X2  [FIDUCIAL-1X2]  101.6,187.96 0 bottom
FID77  FIDUCIAL1X2  [FIDUCIAL-1X2]  109.22,150.62 0 top
FID78  FIDUCIAL1X2  [FIDUCIAL-1X2]  134.62,187.96 0 top
FID79  FIDUCIAL1X2  [FIDUCIAL-1X2]  109.22,150.62 0 bottom
FID80  FIDUCIAL1X2  [FIDUCIAL-1X2]  134.62,187.96 0 bottom
FID81  FIDUCIAL1X2  [FIDUCIAL-1X2]  10.16,213.36 0 top
FID82  FIDUCIAL1X2  [FIDUCIAL-1X2]  35.56,250.7 0 top
FID83  FIDUCIAL1X2  [FIDUCIAL-1X2]  10.16,213.36 0 bottom
FID84  FIDUCIAL1X2  [FIDUCIAL-1X2]  35.56,250.7 0 bottom
FID85  FIDUCIAL1X2  [FIDUCIAL-1X2]  43.18,213.36 0 top
FID86  FIDUCIAL1X2  [FIDUCIAL-1X2]  68.58,250.7 0 top
FID87  FIDUCIAL1X2  [FIDUCIAL-1X2]  43.18,213.36 0 bottom
FID88  FIDUCIAL1X2  [FIDUCIAL-1X2]  68.58,250.7 0 bottom
FID89  FIDUCIAL1X2  [FIDUCIAL-1X2]  76.2,213.36 0 top
FID90  FIDUCIAL1X2  [FIDUCIAL-1X2]  101.6,250.7 0 top
FID91  FIDUCIAL1X2  [FIDUCIAL-1X2]  76.2,213.36 0 bottom
FID92  FIDUCIAL1X2  [FIDUCIAL-1X2]  101.6,250.7 0 bottom
FID93  FIDUCIAL1X2  [FIDUCIAL-1X2]  109.22,213.36 0 top
FID94  FIDUCIAL1X2  [FIDUCIAL-1X2]  134.62,250.7 0 top
FID95  FIDUCIAL1X2  [FIDUCIAL-1X2]  109.22,213.36 0 bottom
FID96  FIDUCIAL1X2  [FIDUCIAL-1X2]  134.62,250.7 0 bottom
FID97  FIDUCIAL1X2  [FIDUCIAL-1X2]  155.96,150.62 0 top
FID98  FIDUCIAL1X2  [FIDUCIAL-1X2]  181.36,187.96 0 top
FID99  FIDUCIAL1X2  [FIDUCIAL-1X2]  155.96,150.62 0 bottom
FID100  FIDUCIAL1X2  [FIDUCIAL-1X2]  181.36,187.96 0 bottom
FID101  FIDUCIAL1X2  [FIDUCIAL-1X2]  188.98,150.62 0 top
FID102  FIDUCIAL1X2  [FIDUCIAL-1X2]  214.38,187.96 0 top
FID103  FIDUCIAL1X2  [FIDUCIAL-1X2]  188.98,150.62 0 bottom
FID104  FIDUCIAL1X2  [FIDUCIAL-1X2]  214.38,187.96 0 bottom
FID105  FIDUCIAL1X2  [FIDUCIAL-1X2]  222,150.62 0 top
FID106  FIDUCIAL1X2  [FIDUCIAL-1X2]  247.4,187.96 0 top
FID107  FIDUCIAL1X2  [FIDUCIAL-1X2]  222,150.62 0 bottom
FID108  FIDUCIAL1X2  [FIDUCIAL-1X2]  247.4,187.96 0 bottom
FID109  FIDUCIAL1X2  [FIDUCIAL-1X2]  255.02,150.62 0 top
FID110  FIDUCIAL1X2  [FIDUCIAL-1X2]  280.42,187.96 0 top
FID111  FIDUCIAL1X2  [FIDUCIAL-1X2]  255.02,150.62 0 bottom
FID112  FIDUCIAL1X2  [FIDUCIAL-1X2]  280.42,187.96 0 bottom
FID113  FIDUCIAL1X2  [FIDUCIAL-1X2]  155.96,213.36 0 top
FID114  FIDUCIAL1X2  [FIDUCIAL-1X2]  181.36,250.7 0 top
FID115  FIDUCIAL1X2  [FIDUCIAL-1X2]  155.96,213.36 0 bottom
FID116  FIDUCIAL1X2  [FIDUCIAL-1X2]  181.36,250.7 0 bottom
FID117  FIDUCIAL1X2  [FIDUCIAL-1X2]  188.98,213.36 0 top
FID118  FIDUCIAL1X2  [FIDUCIAL-1X2]  214.38,250.7 0 top
FID119  FIDUCIAL1X2  [FIDUCIAL-1X2]  188.98,213.36 0 bottom
FID120  FIDUCIAL1X2  [FIDUCIAL-1X2]  214.38,250.7 0 bottom
FID121  FIDUCIAL1X2  [FIDUCIAL-1X2]  222,213.36 0 top
FID122  FIDUCIAL1X2  [FIDUCIAL-1X2]  247.4,250.7 0 top
FID123  FIDUCIAL1X2  [FIDUCIAL-1X2]  222,213.36 0 bottom
FID124  FIDUCIAL1X2  [FIDUCIAL-1X2]  247.4,250.7 0 bottom
FID125  FIDUCIAL1X2  [FIDUCIAL-1X2]  255.02,213.36 0 top
FID126  FIDUCIAL1X2  [FIDUCIAL-1X2]  280.42,250.7 0 top
FID127  FIDUCIAL1X2  [FIDUCIAL-1X2]  255.02,213.36 0 bottom
FID128  FIDUCIAL1X2  [FIDUCIAL-1X2]  280.42,250.7 0 bottom
JP1  FTDI Basic  [1X06]  10.86,34.8 270 top
JP2  M12NO_SILK  [1X12_NO_SILK]  10.16,67.82 0 top
JP3  M12NO_SILK  [1X12_NO_SILK]  10.16,52.58 0 top
JP4  M021X02_NO_SILK  [1X02_NO_SILK]  21.46,63.63 180 top
JP5  M021X02_NO_SILK  [1X02_NO_SILK]  31.88,63.63 180 top
JP6  FTDI Basic  [1X06]  43.88,34.8 270 top
JP7  M12NO_SILK  [1X12_NO_SILK]  43.18,67.82 0 top
JP8  M12NO_SILK  [1X12_NO_SILK]  43.18,52.58 0 top
JP9  M021X02_NO_SILK  [1X02_NO_SILK]  54.48,63.63 180 top
JP10  M021X02_NO_SILK  [1X02_NO_SILK]  64.9,63.63 180 top
JP11  FTDI Basic  [1X06]  76.9,34.8 270 top
JP12  M12NO_SILK  [1X12_NO_SILK]  76.2,67.82 0 top
JP13  M12NO_SILK  [1X12_NO_SILK]  76.2,52.58 0 top
JP14  M021X02_NO_SILK  [1X02_NO_SILK]  87.5,63.63 180 top
JP15  M021X02_NO_SILK  [1X02_NO_SILK]  97.92,63.63 180 top
JP16  FTDI Basic  [1X06]  109.92,34.8 270 top
JP17  M12NO_SILK  [1X12_NO_SILK]  109.22,67.82 0 top
JP18  M12NO_SILK  [1X12_NO_SILK]  109.22,52.58 0 top
JP19  M021X02_NO_SILK  [1X02_NO_SILK]  120.52,63.63 180 top
JP20  M021X02_NO_SILK  [1X02_NO_SILK]  130.94,63.63 180 top
JP21  FTDI Basic  [1X06]  10.86,97.54 270 top
JP22  M12NO_SILK  [1X12_NO_SILK]  10.16,130.56 0 top
JP23  M12NO_SILK  [1X12_NO_SILK]  10.16,115.32 0 top
JP24  M021X02_NO_SILK  [1X02_NO_SILK]  21.46,126.36 180 top
JP25  M021X02_NO_SILK  [1X02_NO_SILK]  31.88,126.36 180 top
JP26  FTDI Basic  [1X06]  43.88,97.54 270 top
JP27  M12NO_SILK  [1X12_NO_SILK]  43.18,130.56 0 top
JP28  M12NO_SILK  [1X12_NO_SILK]  43.18,115.32 0 top
JP29  M021X02_NO_SILK  [1X02_NO_SILK]  54.48,126.36 180 top
JP30  M021X02_NO_SILK  [1X02_NO_SILK]  64.9,126.36 180 top
JP31  FTDI Basic  [1X06]  76.9,97.54 270 top
JP32  M12NO_SILK  [1X12_NO_SILK]  76.2,130.56 0 top
JP33  M12NO_SILK  [1X12_NO_SILK]  76.2,115.32 0 top
JP34  M021X02_NO_SILK  [1X02_NO_SILK]  87.5,126.36 180 top
JP35  M021X02_NO_SILK  [1X02_NO_SILK]  97.92,126.36 180 top
JP36  FTDI Basic  [1X06]  109.92,97.54 270 top
JP37  M12NO_SILK  [1X12_NO_SILK]  109.22,130.56 0 top
JP38  M12NO_SILK  [1X12_NO_SILK]  109.22,115.32 0 top
JP39  M021X02_NO_SILK  [1X02_NO_SILK]  120.52,126.36 180 top
JP40  M021X02_NO_SILK  [1X02_NO_SILK]  130.94,126.36 180 top
JP41  FTDI Basic  [1X06]  156.65,34.8 270 top
JP42  M12NO_SILK  [1X12_NO_SILK]  155.96,67.82 0 top
JP43  M12NO_SILK  [1X12_NO_SILK]  155.96,52.58 0 top
JP44  M021X02_NO_SILK  [1X02_NO_SILK]  167.26,63.63 180 top
JP45  M021X02_NO_SILK  [1X02_NO_SILK]  177.67,63.63 180 top
JP46  FTDI Basic  [1X06]  189.67,34.8 270 top
JP47  M12NO_SILK  [1X12_NO_SILK]  188.98,67.82 0 top
JP48  M12NO_SILK  [1X12_NO_SILK]  188.98,52.58 0 top
JP49  M021X02_NO_SILK  [1X02_NO_SILK]  200.28,63.63 180 top
JP50  M021X02_NO_SILK  [1X02_NO_SILK]  210.69,63.63 180 top
JP51  FTDI Basic  [1X06]  222.69,34.8 270 top
JP52  M12NO_SILK  [1X12_NO_SILK]  222,67.82 0 top
JP53  M12NO_SILK  [1X12_NO_SILK]  222,52.58 0 top
JP54  M021X02_NO_SILK  [1X02_NO_SILK]  233.3,63.63 180 top
JP55  M021X02_NO_SILK  [1X02_NO_SILK]  243.71,63.63 180 top
JP56  FTDI Basic  [1X06]  255.71,34.8 270 top
JP57  M12NO_SILK  [1X12_NO_SILK]  255.02,67.82 0 top
JP58  M12NO_SILK  [1X12_NO_SILK]  255.02,52.58 0 top
JP59  M021X02_NO_SILK  [1X02_NO_SILK]  266.32,63.63 180 top
JP60  M021X02_NO_SILK  [1X02_NO_SILK]  276.73,63.63 180 top
JP61  FTDI Basic  [1X06]  156.65,97.54 270 top
JP62  M12NO_SILK  [1X12_NO_SILK]  155.96,130.56 0 top
JP63  M12NO_SILK  [1X12_NO_SILK]  155.96,115.32 0 top
JP64  M021X02_NO_SILK  [1X02_NO_SILK]  167.26,126.36 180 top
JP65  M021X02_NO_SILK  [1X02_NO_SILK]  177.67,126.36 180 top
JP66  FTDI Basic  [1X06]  189.67,97.54 270 top
JP67  M12NO_SILK  [1X12_NO_SILK]  188.98,130.56 0 top
JP68  M12NO_SILK  [1X12_NO_SILK]  188.98,115.32 0 top
JP69  M021X02_NO_SILK  [1X02_NO_SILK]  200.28,126.36 180 top
JP70  M021X02_NO_SILK  [1X02_NO_SILK]  210.69,126.36 180 top
JP71  FTDI Basic  [1X06]  222.69,97.54 270 top
JP72  M12NO_SILK  [1X12_NO_SILK]  222,130.56 0 top
JP73  M12NO_SILK  [1X12_NO_SILK]  222,115.32 0 top
JP74  M021X02_NO_SILK  [1X02_NO_SILK]  233.3,126.36 180 top
JP75  M021X02_NO_SILK  [1X02_NO_SILK]  243.71,126.36 180 top
JP76  FTDI Basic  [1X06]  255.71,97.54 270 top
JP77  M12NO_SILK  [1X12_NO_SILK]  255.02,130.56 0 top
JP78  M12NO_SILK  [1X12_NO_SILK]  255.02,115.32 0 top
JP79  M021X02_NO_SILK  [1X02_NO_SILK]  266.32,126.36 180 top
JP80  M021X02_NO_SILK  [1X02_NO_SILK]  276.73,126.36 180 top
JP81  FTDI Basic  [1X06]  10.86,173.99 270 top
JP82  M12NO_SILK  [1X12_NO_SILK]  10.16,207.01 0 top
JP83  M12NO_SILK  [1X12_NO_SILK]  10.16,191.77 0 top
JP84  M021X02_NO_SILK  [1X02_NO_SILK]  21.46,202.82 180 top
JP85  M021X02_NO_SILK  [1X02_NO_SILK]  31.88,202.82 180 top
JP86  FTDI Basic  [1X06]  43.88,173.99 270 top
JP87  M12NO_SILK  [1X12_NO_SILK]  43.18,207.01 0 top
JP88  M12NO_SILK  [1X12_NO_SILK]  43.18,191.77 0 top
JP89  M021X02_NO_SILK  [1X02_NO_SILK]  54.48,202.82 180 top
JP90  M021X02_NO_SILK  [1X02_NO_SILK]  64.9,202.82 180 top
JP91  FTDI Basic  [1X06]  76.9,173.99 270 top
JP92  M12NO_SILK  [1X12_NO_SILK]  76.2,207.01 0 top
JP93  M12NO_SILK  [1X12_NO_SILK]  76.2,191.77 0 top
JP94  M021X02_NO_SILK  [1X02_NO_SILK]  87.5,202.82 180 top
JP95  M021X02_NO_SILK  [1X02_NO_SILK]  97.92,202.82 180 top
JP96  FTDI Basic  [1X06]  109.92,173.99 270 top
JP97  M12NO_SILK  [1X12_NO_SILK]  109.22,207.01 0 top
JP98  M12NO_SILK  [1X12_NO_SILK]  109.22,191.77 0 top
JP99  M021X02_NO_SILK  [1X02_NO_SILK]  120.52,202.82 180 top
JP100  M021X02_NO_SILK  [1X02_NO_SILK]  130.94,202.82 180 top
JP101  FTDI Basic  [1X06]  10.86,236.73 270 top
JP102  M12NO_SILK  [1X12_NO_SILK]  10.16,269.75 0 top
JP103  M12NO_SILK  [1X12_NO_SILK]  10.16,254.51 0 top
JP104  M021X02_NO_SILK  [1X02_NO_SILK]  21.46,265.56 180 top
JP105  M021X02_NO_SILK  [1X02_NO_SILK]  31.88,265.56 180 top
JP106  FTDI Basic  [1X06]  43.88,236.73 270 top
JP107  M12NO_SILK  [1X12_NO_SILK]  43.18,269.75 0 top
JP108  M12NO_SILK  [1X12_NO_SILK]  43.18,254.51 0 top
JP109  M021X02_NO_SILK  [1X02_NO_SILK]  54.48,265.56 180 top
JP110  M021X02_NO_SILK  [1X02_NO_SILK]  64.9,265.56 180 top
JP111  FTDI Basic  [1X06]  76.9,236.73 270 top
JP112  M12NO_SILK  [1X12_NO_SILK]  76.2,269.75 0 top
JP113  M12NO_SILK  [1X12_NO_SILK]  76.2,254.51 0 top
JP114  M021X02_NO_SILK  [1X02_NO_SILK]  87.5,265.56 180 top
JP115  M021X02_NO_SILK  [1X02_NO_SILK]  97.92,265.56 180 top
JP116  FTDI Basic  [1X06]  109.92,236.73 270 top
JP117  M12NO_SILK  [1X12_NO_SILK]  109.22,269.75 0 top
JP118  M12NO_SILK  [1X12_NO_SILK]  109.22,254.51 0 top
JP119  M021X02_NO_SILK  [1X02_NO_SILK]  120.52,265.56 180 top
JP120  M021X02_NO_SILK  [1X02_NO_SILK]  130.94,265.56 180 top
JP121  FTDI Basic  [1X06]  156.65,173.99 270 top
JP122  M12NO_SILK  [1X12_NO_SILK]  155.96,207.01 0 top
JP123  M12NO_SILK  [1X12_NO_SILK]  155.96,191.77 0 top
JP124  M021X02_NO_SILK  [1X02_NO_SILK]  167.26,202.82 180 top
JP125  M021X02_NO_SILK  [1X02_NO_SILK]  177.67,202.82 180 top
JP126  FTDI Basic  [1X06]  189.67,173.99 270 top
JP127  M12NO_SILK  [1X12_NO_SILK]  188.98,207.01 0 top
JP128  M12NO_SILK  [1X12_NO_SILK]  188.98,191.77 0 top
JP129  M021X02_NO_SILK  [1X02_NO_SILK]  200.28,202.82 180 top
JP130  M021X02_NO_SILK  [1X02_NO_SILK]  210.69,202.82 180 top
JP131  FTDI Basic  [1X06]  222.69,173.99 270 top
JP132  M12NO_SILK  [1X12_NO_SILK]  222,207.01 0 top
JP133  M12NO_SILK  [1X12_NO_SILK]  222,191.77 0 top
JP134  M021X02_NO_SILK  [1X02_NO_SILK]  233.3,202.82 180 top
JP135  M021X02_NO_SILK  [1X02_NO_SILK]  243.71,202.82 180 top
JP136  FTDI Basic  [1X06]  255.71,173.99 270 top
JP137  M12NO_SILK  [1X12_NO_SILK]  255.02,207.01 0 top
JP138  M12NO_SILK  [1X12_NO_SILK]  255.02,191.77 0 top
JP139  M021X02_NO_SILK  [1X02_NO_SILK]  266.32,202.82 180 top
JP140  M021X02_NO_SILK  [1X02_NO_SILK]  276.73,202.82 180 top
JP141  FTDI Basic  [1X06]  156.65,236.73 270 top
JP142  M12NO_SILK  [1X12_NO_SILK]  155.96,269.75 0 top
JP143  M12NO_SILK  [1X12_NO_SILK]  155.96,254.51 0 top
JP144  M021X02_NO_SILK  [1X02_NO_SILK]  167.26,265.56 180 top
JP145  M021X02_NO_SILK  [1X02_NO_SILK]  177.67,265.56 180 top
JP146  FTDI Basic  [1X06]  189.67,236.73 270 top
JP147  M12NO_SILK  [1X12_NO_SILK]  188.98,269.75 0 top
JP148  M12NO_SILK  [1X12_NO_SILK]  188.98,254.51 0 top
JP149  M021X02_NO_SILK  [1X02_NO_SILK]  200.28,265.56 180 top
JP150  M021X02_NO_SILK  [1X02_NO_SILK]  210.69,265.56 180 top
JP151  FTDI Basic  [1X06]  222.69,236.73 270 top
JP152  M12NO_SILK  [1X12_NO_SILK]  222,269.75 0 top
JP153  M12NO_SILK  [1X12_NO_SILK]  222,254.51 0 top
JP154  M021X02_NO_SILK  [1X02_NO_SILK]  233.3,265.56 180 top
JP155  M021X02_NO_SILK  [1X02_NO_SILK]  243.71,265.56 180 top
JP156  FTDI Basic  [1X06]  255.71,236.73 270 top
JP157  M12NO_SILK  [1X12_NO_SILK]  255.02,269.75 0 top
JP158  M12NO_SILK  [1X12_NO_SILK]  255.02,254.51 0 top
JP159  M021X02_NO_SILK  [1X02_NO_SILK]  266.32,265.56 180 top
JP160  M021X02_NO_SILK  [1X02_NO_SILK]  276.73,265.56 180 top
LED1  Red  [0603-LED-ALT1]  11.68,13.21 90 top
LED2  Red  [0603-LED-ALT1]  44.7,13.21 90 top
LED3  Red  [0603-LED-ALT1]  77.72,13.21 90 top
LED4  Red  [0603-LED-ALT1]  110.74,13.21 90 top
LED5  Red  [0603-LED-ALT1]  11.68,75.95 90 top
LED6  Red  [0603-LED-ALT1]  44.7,75.95 90 top
LED7  Red  [0603-LED-ALT1]  77.72,75.95 90 top
LED8  Red  [0603-LED-ALT1]  110.74,75.95 90 top
LED9  Red  [0603-LED-ALT1]  157.48,13.21 90 top
LED10  Red  [0603-LED-ALT1]  190.5,13.21 90 top
LED11  Red  [0603-LED-ALT1]  223.52,13.21 90 top
LED12  Red  [0603-LED-ALT1]  256.54,13.21 90 top
LED13  Red  [0603-LED-ALT1]  157.48,75.95 90 top
LED14  Red  [0603-LED-ALT1]  190.5,75.95 90 top
LED15  Red  [0603-LED-ALT1]  223.52,75.95 90 top
LED16  Red  [0603-LED-ALT1]  256.54,75.95 90 top
LED17  Red  [0603-LED-ALT1]  11.68,152.4 90 top
LED18  Red  [0603-LED-ALT1]  44.7,152.4 90 top
LED19  Red  [0603-LED-ALT1]  77.72,152.4 90 top
LED20  Red  [0603-LED-ALT1]  110.74,152.4 90 top
LED21  Red  [0603-LED-ALT1]  11.68,215.14 90 top
LED22  Red  [0603-LED-ALT1]  44.7,215.14 90 top
LED23  Red  [0603-LED-ALT1]  77.72,215.14 90 top
LED24  Red  [0603-LED-ALT1]  110.74,215.14 90 top
LED25  Red  [0603-LED-ALT1]  157.48,152.4 90 top
LED26  Red  [0603-LED-ALT1]  190.5,152.4 90 top
LED27  Red  [0603-LED-ALT1]  223.52,152.4 90 top
LED28  Red  [0603-LED-ALT1]  256.54,152.4 90 top
LED29  Red  [0603-LED-ALT1]  157.48,215.14 90 top
LED30  Red  [0603-LED-ALT1]  190.5,215.14 90 top
LED31  Red  [0603-LED-ALT1]  223.52,215.14 90 top
LED32  Red  [0603-LED-ALT1]  256.54,215.14 90 top
LOGO1  OSHW-LOGOS  [OSHW-LOGO-S]  18.54,8.64 0 top
LOGO2  OSHW-LOGOS  [OSHW-LOGO-S]  14.73,8.64 0 bottom
LOGO3  SFE_LOGO_NAME_FLAME.1_INCH  [SFE_LOGO_NAME_FLAME_.1]  29.97,7.11 0 bottom
LOGO4  SFE_LOGO_NAME_FLAME.1_INCH  [SFE_LOGO_NAME_FLAME_.1]  22,7.11 0 top
LOGO5  OSHW-LOGOS  [OSHW-LOGO-S]  47.75,8.64 0 bottom
LOGO6  SFE_LOGO_NAME_FLAME.1_INCH  [SFE_LOGO_NAME_FLAME_.1]  62.99,7.11 0 bottom
LOGO7  OSHW-LOGOS  [OSHW-LOGO-S]  51.56,8.64 0 top
LOGO8  SFE_LOGO_NAME_FLAME.1_INCH  [SFE_LOGO_NAME_FLAME_.1]  55.02,7.11 0 top
LOGO9  OSHW-LOGOS  [OSHW-LOGO-S]  80.77,8.64 0 bottom
LOGO10  SFE_LOGO_NAME_FLAME.1_INCH  [SFE_LOGO_NAME_FLAME_.1]  96.01,7.11 0 bottom
LOGO11  OSHW-LOGOS  [OSHW-LOGO-S]  84.58,8.64 0 top
LOGO12  SFE_LOGO_NAME_FLAME.1_INCH  [SFE_LOGO_NAME_FLAME_.1]  88.04,7.11 0 top
LOGO13  OSHW-LOGOS  [OSHW-LOGO-S]  113.79,8.64 0 bottom
LOGO14  SFE_LOGO_NAME_FLAME.1_INCH  [SFE_LOGO_NAME_FLAME_.1]  129.03,7.11 0 bottom
LOGO15  OSHW-LOGOS  [OSHW-LOGO-S]  117.6,8.64 0 top
LOGO16  SFE_LOGO_NAME_FLAME.1_INCH  [SFE_LOGO_NAME_FLAME_.1]  121.06,7.11 0 top
LOGO17  OSHW-LOGOS  [OSHW-LOGO-S]  14.73,71.37 0 bottom
LOGO18  SFE_LOGO_NAME_FLAME.1_INCH  [SFE_LOGO_NAME_FLAME_.1]  29.97,69.85 0 bottom
LOGO19  OSHW-LOGOS  [OSHW-LOGO-S]  18.54,71.37 0 top
LOGO20  SFE_LOGO_NAME_FLAME.1_INCH  [SFE_LOGO_NAME_FLAME_.1]  22,69.85 0 top
LOGO21  OSHW-LOGOS  [OSHW-LOGO-S]  47.75,71.37 0 bottom
LOGO22  SFE_LOGO_NAME_FLAME.1_INCH  [SFE_LOGO_NAME_FLAME_.1]  62.99,69.85 0 bottom
LOGO23  OSHW-LOGOS  [OSHW-LOGO-S]  51.56,71.37 0 top
LOGO24  SFE_LOGO_NAME_FLAME.1_INCH  [SFE_LOGO_NAME_FLAME_.1]  55.02,69.85 0 top
LOGO25  OSHW-LOGOS  [OSHW-LOGO-S]  80.77,71.37 0 bottom
LOGO26  SFE_LOGO_NAME_FLAME.1_INCH  [SFE_LOGO_NAME_FLAME_.1]  96.01,69.85 0 bottom
LOGO27  OSHW-LOGOS  [OSHW-LOGO-S]  84.58,71.37 0 top
LOGO28  SFE_LOGO_NAME_FLAME.1_INCH  [SFE_LOGO_NAME_FLAME_.1]  88.04,69.85 0 top
LOGO29  OSHW-LOGOS  [OSHW-LOGO-S]  113.79,71.37 0 bottom
LOGO30  SFE_LOGO_NAME_FLAME.1_INCH  [SFE_LOGO_NAME_FLAME_.1]  129.03,69.85 0 bottom
LOGO31  OSHW-LOGOS  [OSHW-LOGO-S]  117.6,71.37 0 top
LOGO32  SFE_LOGO_NAME_FLAME.1_INCH  [SFE_LOGO_NAME_FLAME_.1]  121.06,69.85 0 top
LOGO33  OSHW-LOGOS  [OSHW-LOGO-S]  160.53,8.64 0 bottom
LOGO34  SFE_LOGO_NAME_FLAME.1_INCH  [SFE_LOGO_NAME_FLAME_.1]  175.77,7.11 0 bottom
LOGO35  OSHW-LOGOS  [OSHW-LOGO-S]  164.34,8.64 0 top
LOGO36  SFE_LOGO_NAME_FLAME.1_INCH  [SFE_LOGO_NAME_FLAME_.1]  167.79,7.11 0 top
LOGO37  OSHW-LOGOS  [OSHW-LOGO-S]  193.55,8.64 0 bottom
LOGO38  SFE_LOGO_NAME_FLAME.1_INCH  [SFE_LOGO_NAME_FLAME_.1]  208.79,7.11 0 bottom
LOGO39  OSHW-LOGOS  [OSHW-LOGO-S]  197.36,8.64 0 top
LOGO40  SFE_LOGO_NAME_FLAME.1_INCH  [SFE_LOGO_NAME_FLAME_.1]  200.81,7.11 0 top
LOGO41  OSHW-LOGOS  [OSHW-LOGO-S]  226.57,8.64 0 bottom
LOGO42  SFE_LOGO_NAME_FLAME.1_INCH  [SFE_LOGO_NAME_FLAME_.1]  241.81,7.11 0 bottom
LOGO43  OSHW-LOGOS  [OSHW-LOGO-S]  230.38,8.64 0 top
LOGO44  SFE_LOGO_NAME_FLAME.1_INCH  [SFE_LOGO_NAME_FLAME_.1]  233.83,7.11 0 top
LOGO45  OSHW-LOGOS  [OSHW-LOGO-S]  259.59,8.64 0 bottom
LOGO46  SFE_LOGO_NAME_FLAME.1_INCH  [SFE_LOGO_NAME_FLAME_.1]  274.83,7.11 0 bottom
LOGO47  OSHW-LOGOS  [OSHW-LOGO-S]  263.4,8.64 0 top
LOGO48  SFE_LOGO_NAME_FLAME.1_INCH  [SFE_LOGO_NAME_FLAME_.1]  266.85,7.11 0 top
LOGO49  OSHW-LOGOS  [OSHW-LOGO-S]  160.53,71.37 0 bottom
LOGO50  SFE_LOGO_NAME_FLAME.1_INCH  [SFE_LOGO_NAME_FLAME_.1]  175.77,69.85 0 bottom
LOGO51  OSHW-LOGOS  [OSHW-LOGO-S]  164.34,71.37 0 top
LOGO52  SFE_LOGO_NAME_FLAME.1_INCH  [SFE_LOGO_NAME_FLAME_.1]  167.79,69.85 0 top
LOGO53  OSHW-LOGOS  [OSHW-LOGO-S]  193.55,71.37 0 bottom
LOGO54  SFE_LOGO_NAME_FLAME.1_INCH  [SFE_LOGO_NAME_FLAME_.1]  208.79,69.85 0 bottom
LOGO55  OSHW-LOGOS  [OSHW-LOGO-S]  197.36,71.37 0 top
LOGO56  SFE_LOGO_NAME_FLAME.1_INCH  [SFE_LOGO_NAME_FLAME_.1]  200.81,69.85 0 top
LOGO57  OSHW-LOGOS  [OSHW-LOGO-S]  226.57,71.37 0 bottom
LOGO58  SFE_LOGO_NAME_FLAME.1_INCH  [SFE_LOGO_NAME_FLAME_.1]  241.81,69.85 0 bottom
LOGO59  OSHW-LOGOS  [OSHW-LOGO-S]  230.38,71.37 0 top
LOGO60  SFE_LOGO_NAME_FLAME.1_INCH  [SFE_LOGO_NAME_FLAME_.1]  233.83,69.85 0 top
LOGO61  OSHW-LOGOS  [OSHW-LOGO-S]  259.59,71.37 0 bottom
LOGO62  SFE_LOGO_NAME_FLAME.1_INCH  [SFE_LOGO_NAME_FLAME_.1]  274.83,69.85 0 bottom
LOGO63  OSHW-LOGOS  [OSHW-LOGO-S]  263.4,71.37 0 top
LOGO64  SFE_LOGO_NAME_FLAME.1_INCH  [SFE_LOGO_NAME_FLAME_.1]  266.85,69.85 0 top
LOGO65  OSHW-LOGOS  [OSHW-LOGO-S]  14.73,147.83 0 bottom
LOGO66  SFE_LOGO_NAME_FLAME.1_INCH  [SFE_LOGO_NAME_FLAME_.1]  29.97,146.3 0 bottom
LOGO67  OSHW-LOGOS  [OSHW-LOGO-S]  18.54,147.83 0 top
LOGO68  SFE_LOGO_NAME_FLAME.1_INCH  [SFE_LOGO_NAME_FLAME_.1]  22,146.3 0 top
LOGO69  OSHW-LOGOS  [OSHW-LOGO-S]  47.75,147.83 0 bottom
LOGO70  SFE_LOGO_NAME_FLAME.1_INCH  [SFE_LOGO_NAME_FLAME_.1]  62.99,146.3 0 bottom
LOGO71  OSHW-LOGOS  [OSHW-LOGO-S]  51.56,147.83 0 top
LOGO72  SFE_LOGO_NAME_FLAME.1_INCH  [SFE_LOGO_NAME_FLAME_.1]  55.02,146.3 0 top
LOGO73  OSHW-LOGOS  [OSHW-LOGO-S]  80.77,147.83 0 bottom
LOGO74  SFE_LOGO_NAME_FLAME.1_INCH  [SFE_LOGO_NAME_FLAME_.1]  96.01,146.3 0 bottom
LOGO75  OSHW-LOGOS  [OSHW-LOGO-S]  84.58,147.83 0 top
LOGO76  SFE_LOGO_NAME_FLAME.1_INCH  [SFE_LOGO_NAME_FLAME_.1]  88.04,146.3 0 top
LOGO77  OSHW-LOGOS  [OSHW-LOGO-S]  113.79,147.83 0 bottom
LOGO78  SFE_LOGO_NAME_FLAME.1_INCH  [SFE_LOGO_NAME_FLAME_.1]  129.03,146.3 0 bottom
LOGO79  OSHW-LOGOS  [OSHW-LOGO-S]  117.6,147.83 0 top
LOGO80  SFE_LOGO_NAME_FLAME.1_INCH  [SFE_LOGO_NAME_FLAME_.1]  121.06,146.3 0 top
LOGO81  OSHW-LOGOS  [OSHW-LOGO-S]  14.73,210.57 0 bottom
LOGO82  SFE_LOGO_NAME_FLAME.1_INCH  [SFE_LOGO_NAME_FLAME_.1]  29.97,209.04 0 bottom
LOGO83  OSHW-LOGOS  [OSHW-LOGO-S]  18.54,210.57 0 top
LOGO84  SFE_LOGO_NAME_FLAME.1_INCH  [SFE_LOGO_NAME_FLAME_.1]  22,209.04 0 top
LOGO85  OSHW-LOGOS  [OSHW-LOGO-S]  47.75,210.57 0 bottom
LOGO86  SFE_LOGO_NAME_FLAME.1_INCH  [SFE_LOGO_NAME_FLAME_.1]  62.99,209.04 0 bottom
LOGO87  OSHW-LOGOS  [OSHW-LOGO-S]  51.56,210.57 0 top
LOGO88  SFE_LOGO_NAME_FLAME.1_INCH  [SFE_LOGO_NAME_FLAME_.1]  55.02,209.04 0 top
LOGO89  OSHW-LOGOS  [OSHW-LOGO-S]  80.77,210.57 0 bottom
LOGO90  SFE_LOGO_NAME_FLAME.1_INCH  [SFE_LOGO_NAME_FLAME_.1]  96.01,209.04 0 bottom
LOGO91  OSHW-LOGOS  [OSHW-LOGO-S]  84.58,210.57 0 top
LOGO92  SFE_LOGO_NAME_FLAME.1_INCH  [SFE_LOGO_NAME_FLAME_.1]  88.04,209.04 0 top
LOGO93  OSHW-LOGOS  [OSHW-LOGO-S]  113.79,210.57 0 bottom
LOGO94  SFE_LOGO_NAME_FLAME.1_INCH  [SFE_LOGO_NAME_FLAME_.1]  129.03,209.04 0 bottom
LOGO95  OSHW-LOGOS  [OSHW-LOGO-S]  117.6,210.57 0 top
LOGO96  SFE_LOGO_NAME_FLAME.1_INCH  [SFE_LOGO_NAME_FLAME_.1]  121.06,209.04 0 top
LOGO97  OSHW-LOGOS  [OSHW-LOGO-S]  160.53,147.83 0 bottom
LOGO98  SFE_LOGO_NAME_FLAME.1_INCH  [SFE_LOGO_NAME_FLAME_.1]  175.77,146.3 0 bottom
LOGO99  OSHW-LOGOS  [OSHW-LOGO-S]  164.34,147.83 0 top
LOGO100  SFE_LOGO_NAME_FLAME.1_INCH  [SFE_LOGO_NAME_FLAME_.1]  167.79,146.3 0 top
LOGO101  OSHW-LOGOS  [OSHW-LOGO-S]  193.55,147.83 0 bottom
LOGO102  SFE_LOGO_NAME_FLAME.1_INCH  [SFE_LOGO_NAME_FLAME_.1]  208.79,146.3 0 bottom
LOGO103  OSHW-LOGOS  [OSHW-LOGO-S]  197.36,147.83 0 top
LOGO104  SFE_LOGO_NAME_FLAME.1_INCH  [SFE_LOGO_NAME_FLAME_.1]  200.81,146.3 0 top
LOGO105  OSHW-LOGOS  [OSHW-LOGO-S]  226.57,147.83 0 bottom
LOGO106  SFE_LOGO_NAME_FLAME.1_INCH  [SFE_LOGO_NAME_FLAME_.1]  241.81,146.3 0 bottom
LOGO107  OSHW-LOGOS  [OSHW-LOGO-S]  230.38,147.83 0 top
LOGO108  SFE_LOGO_NAME_FLAME.1_INCH  [SFE_LOGO_NAME_FLAME_.1]  233.83,146.3 0 top
LOGO109  OSHW-LOGOS  [OSHW-LOGO-S]  259.59,147.83 0 bottom
LOGO110  SFE_LOGO_NAME_FLAME.1_INCH  [SFE_LOGO_NAME_FLAME_.1]  274.83,146.3 0 bottom
LOGO111  OSHW-LOGOS  [OSHW-LOGO-S]  263.4,147.83 0 top
LOGO112  SFE_LOGO_NAME_FLAME.1_INCH  [SFE_LOGO_NAME_FLAME_.1]  266.85,146.3 0 top
LOGO113  OSHW-LOGOS  [OSHW-LOGO-S]  160.53,210.57 0 bottom
LOGO114  SFE_LOGO_NAME_FLAME.1_INCH  [SFE_LOGO_NAME_FLAME_.1]  175.77,209.04 0 bottom
LOGO115  OSHW-LOGOS  [OSHW-LOGO-S]  164.34,210.57 0 top
LOGO116  SFE_LOGO_NAME_FLAME.1_INCH  [SFE_LOGO_NAME_FLAME_.1]  167.79,209.04 0 top
LOGO117  OSHW-LOGOS  [OSHW-LOGO-S]  193.55,210.57 0 bottom
LOGO118  SFE_LOGO_NAME_FLAME.1_INCH  [SFE_LOGO_NAME_FLAME_.1]  208.79,209.04 0 bottom
LOGO119  OSHW-LOGOS  [OSHW-LOGO-S]  197.36,210.57 0 top
LOGO120  SFE_LOGO_NAME_FLAME.1_INCH  [SFE_LOGO_NAME_FLAME_.1]  200.81,209.04 0 top
LOGO121  OSHW-LOGOS  [OSHW-LOGO-S]  226.57,210.57 0 bottom
LOGO122  SFE_LOGO_NAME_FLAME.1_INCH  [SFE_LOGO_NAME_FLAME_.1]  241.81,209.04 0 bottom
LOGO123  OSHW-LOGOS  [OSHW-LOGO-S]  230.38,210.57 0 top
LOGO124  SFE_LOGO_NAME_FLAME.1_INCH  [SFE_LOGO_NAME_FLAME_.1]  233.83,209.04 0 top
LOGO125  OSHW-LOGOS  [OSHW-LOGO-S]  259.59,210.57 0 bottom
LOGO126  SFE_LOGO_NAME_FLAME.1_INCH  [SFE_LOGO_NAME_FLAME_.1]  274.83,209.04 0 bottom
LOGO127  OSHW-LOGOS  [OSHW-LOGO-S]  263.4,210.57 0 top
LOGO128  SFE_LOGO_NAME_FLAME.1_INCH  [SFE_LOGO_NAME_FLAME_.1]  266.85,209.04 0 top
R1  10K  [0603-RES]  44.7,14.61 180 top
R2  10K  [0603-RES]  13.34,37.34 270 top
R3  10K  [0603-RES]  46.35,37.34 270 top
R4  330  [0603-RES]  44.83,18.29 180 top
R5  10K  [0603-RES]  77.72,14.61 180 top
R6  330  [0603-RES]  11.81,18.29 180 top
R7  10K  [0603-RES]  79.38,37.34 270 top
R8  330  [0603-RES]  77.85,18.29 180 top
R9  10K  [0603-RES]  110.74,14.61 180 top
R10  10K  [0603-RES]  112.39,37.34 270 top
R11  10K  [0603-RES]  11.68,14.61 180 top
R12  330  [0603-RES]  110.87,18.29 180 top
R13  10K  [0603-RES]  11.68,77.34 180 top
R14  10K  [0603-RES]  13.34,100.08 270 top
R15  330  [0603-RES]  11.81,81.03 180 top
R16  10K  [0603-RES]  44.7,77.34 180 top
R17  10K  [0603-RES]  46.35,100.08 270 top
R18  330  [0603-RES]  44.83,81.03 180 top
R19  10K  [0603-RES]  77.72,77.34 180 top
R20  10K  [0603-RES]  79.38,100.08 270 top
R21  330  [0603-RES]  77.85,81.03 180 top
R22  10K  [0603-RES]  110.74,77.34 180 top
R23  10K  [0603-RES]  112.39,100.08 270 top
R24  330  [0603-RES]  110.87,81.03 180 top
R25  10K  [0603-RES]  157.48,14.61 180 top
R26  10K  [0603-RES]  159.13,37.34 270 top
R27  330  [0603-RES]  157.61,18.29 180 top
R28  10K  [0603-RES]  190.5,14.61 180 top
R29  10K  [0603-RES]  192.15,37.34 270 top
R30  330  [0603-RES]  190.63,18.29 180 top
R31  10K  [0603-RES]  223.52,14.61 180 top
R32  10K  [0603-RES]  225.17,37.34 270 top
R33  330  [0603-RES]  223.65,18.29 180 top
R34  10K  [0603-RES]  256.54,14.61 180 top
R35  10K  [0603-RES]  258.19,37.34 270 top
R36  330  [0603-RES]  256.67,18.29 180 top
R37  10K  [0603-RES]  157.48,77.34 180 top
R38  10K  [0603-RES]  159.13,100.08 270 top
R39  330  [0603-RES]  157.61,81.03 180 top
R40  10K  [0603-RES]  190.5,77.34 180 top
R41  10K  [0603-RES]  192.15,100.08 270 top
R42  330  [0603-RES]  190.63,81.03 180 top
R43  10K  [0603-RES]  223.52,77.34 180 top
R44  10K  [0603-RES]  225.17,100.08 270 top
R45  330  [0603-RES]  223.65,81.03 180 top
R46  10K  [0603-RES]  256.54,77.34 180 top
R47  10K  [0603-RES]  258.19,100.08 270 top
R48  330  [0603-RES]  256.67,81.03 180 top
R49  10K  [0603-RES]  11.68,153.8 180 top
R50  10K  [0603-RES]  13.34,176.53 270 top
R51  330  [0603-RES]  11.81,157.48 180 top
R52  10K  [0603-RES]  44.7,153.8 180 top
R53  10K  [0603-RES]  46.35,176.53 270 top
R54  330  [0603-RES]  44.83,157.48 180 top
R55  10K  [0603-RES]  77.72,153.8 180 top